# Altium PCB CFD_2Channel.PcbDoc (part 1 of 3)
Units mil, origin at the board's own origin, x right, y up, seen from the top; angles counter-clockwise.
Board outline 5560 x 8750 mil, 4 copper layers (Top Layer, Top Plane, Bottom Plane, Bottom Layer), stack 61.356 mil thick; 216 components, 185 nets, 910 pads, 397 vias.
Unrouted connection lines stored in the file: 1.
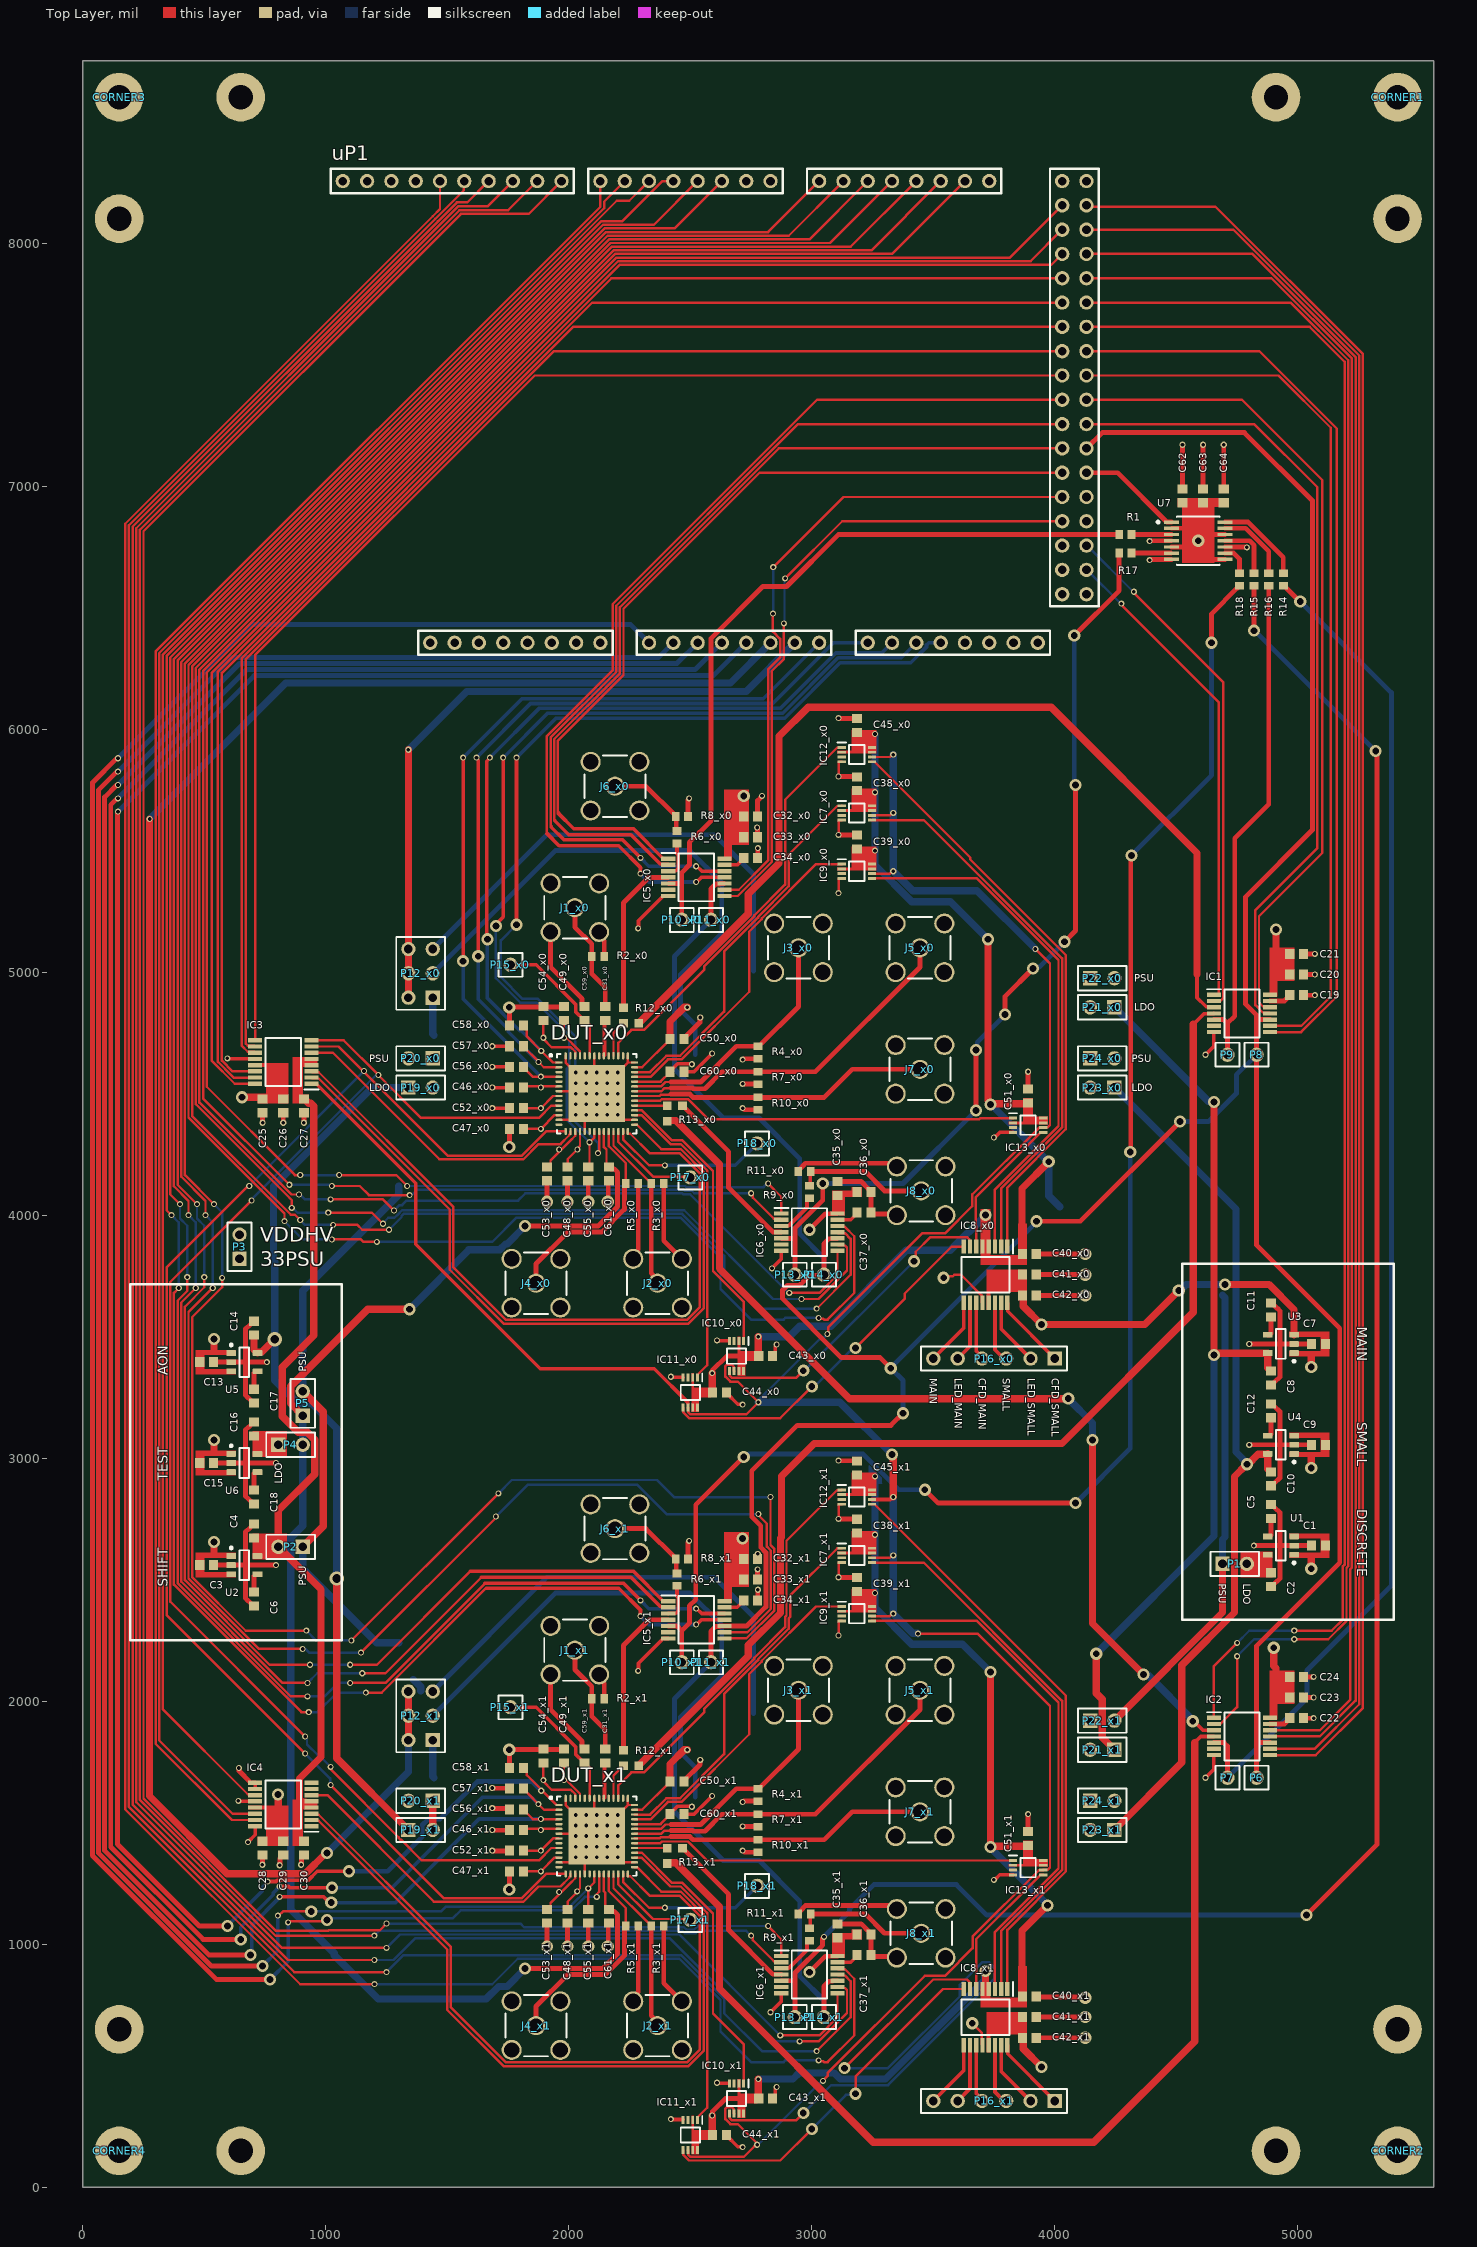
[diagram p0: Top Layer view]
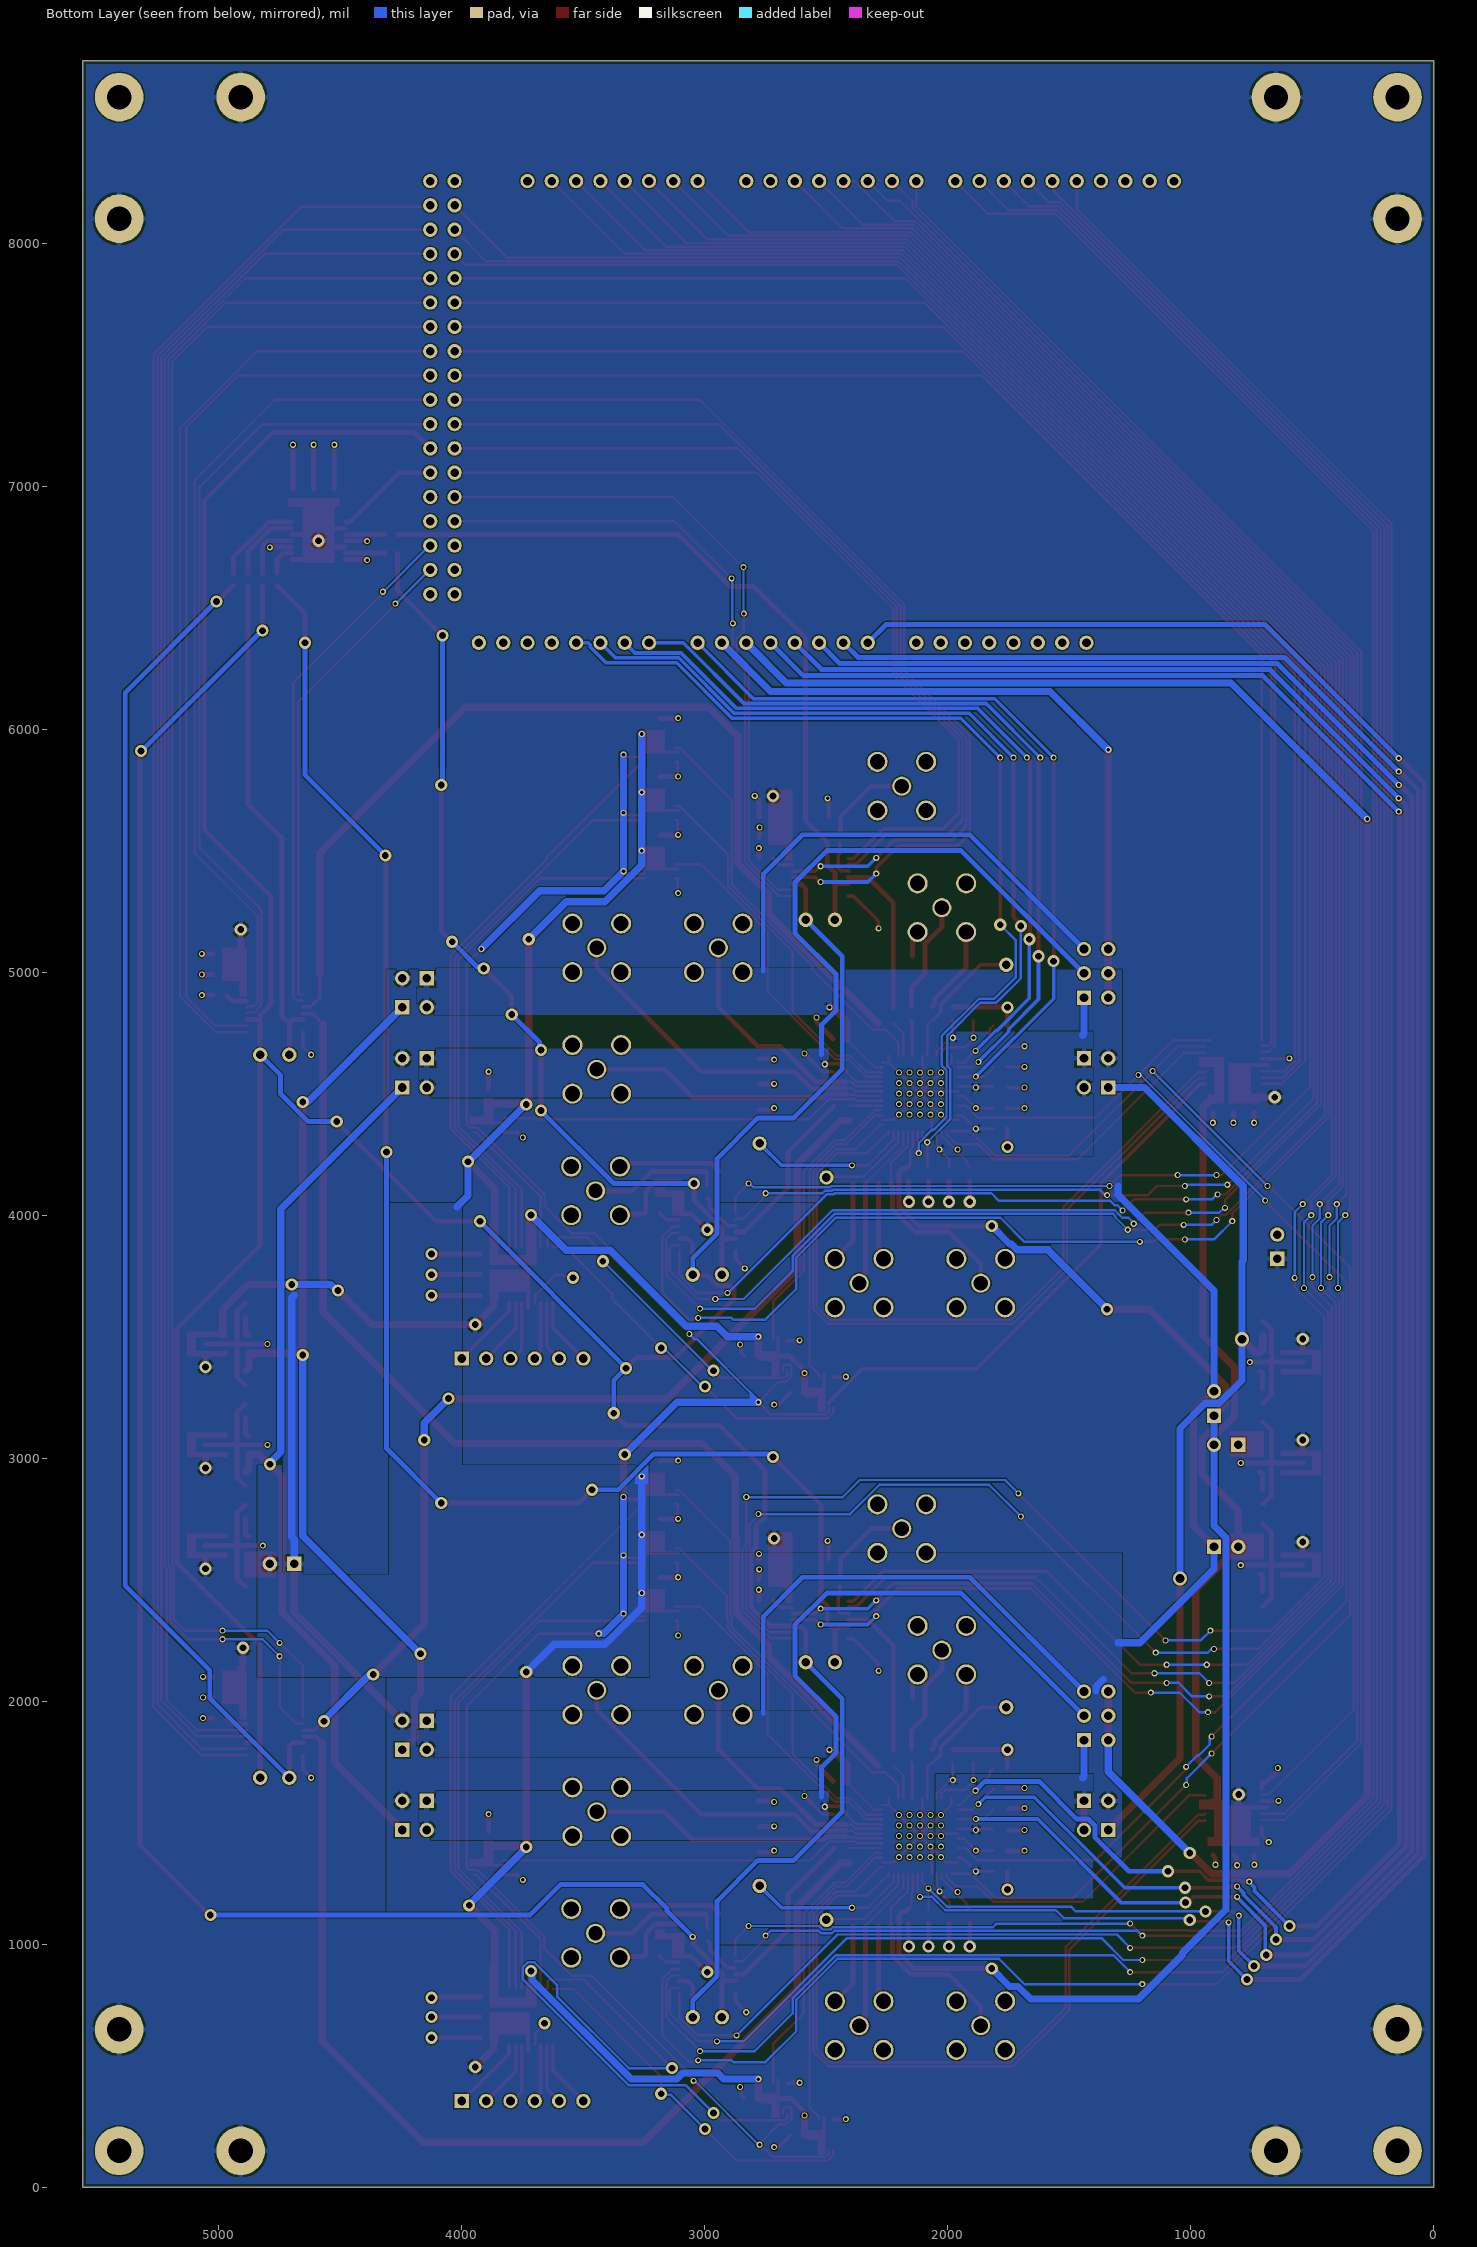
[diagram p1: Bottom Layer view, seen from below]
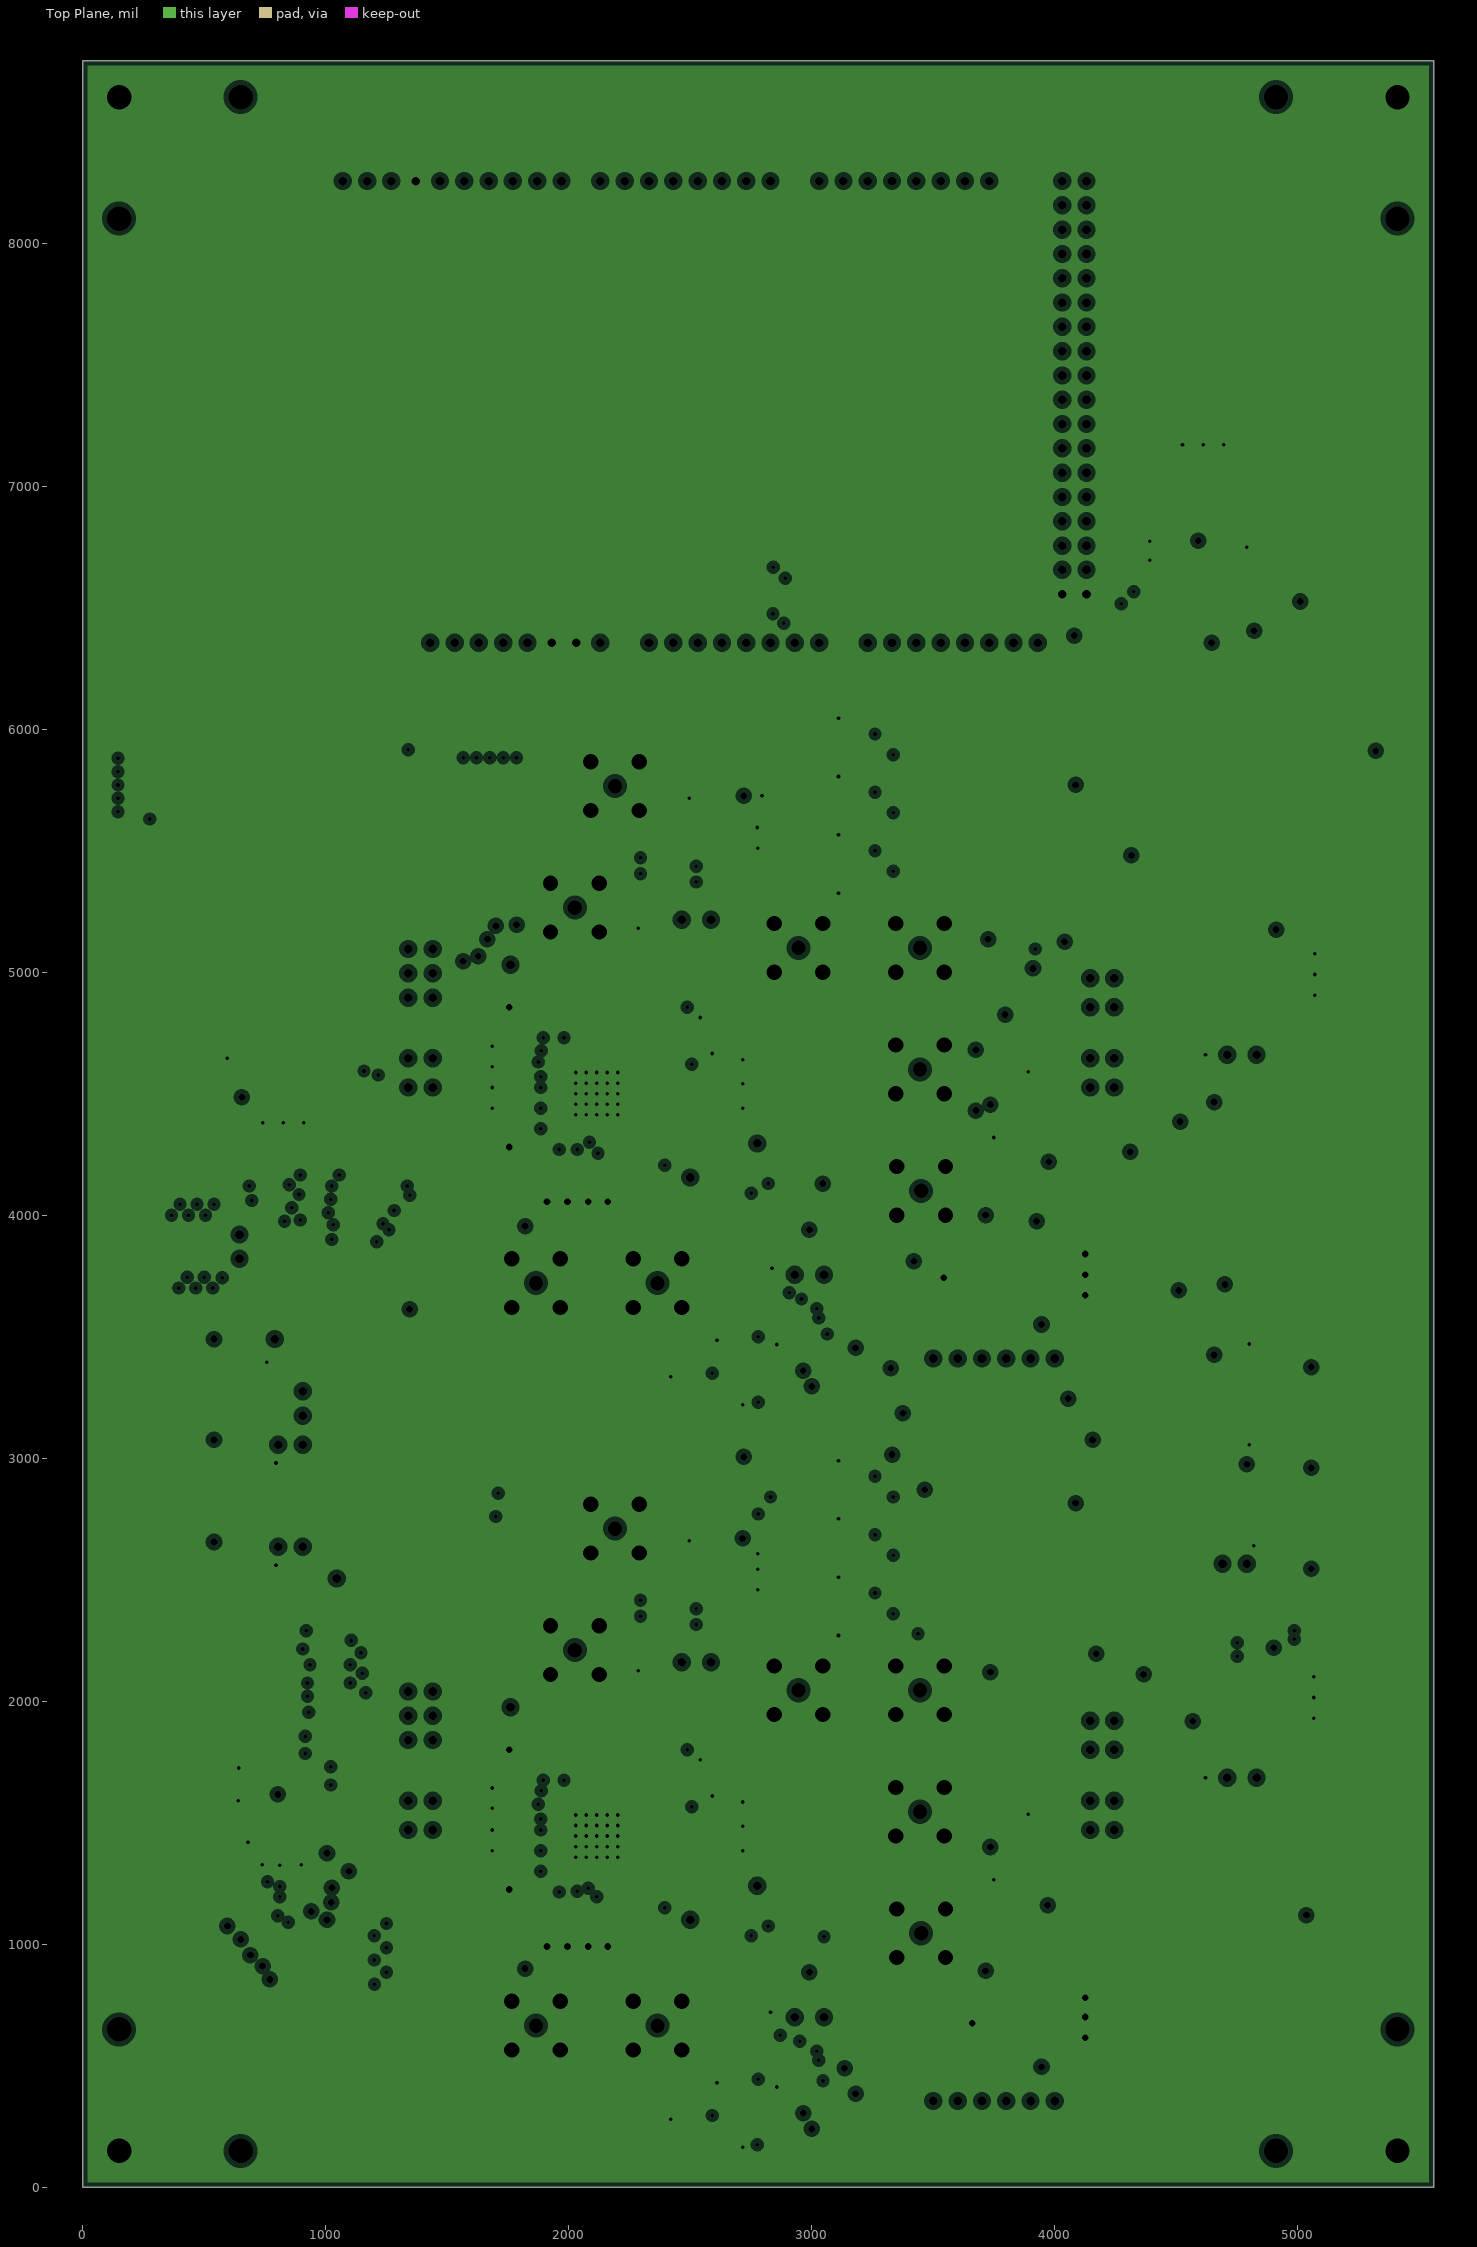
[diagram p2: Top Plane, clearances drawn from the general rule]
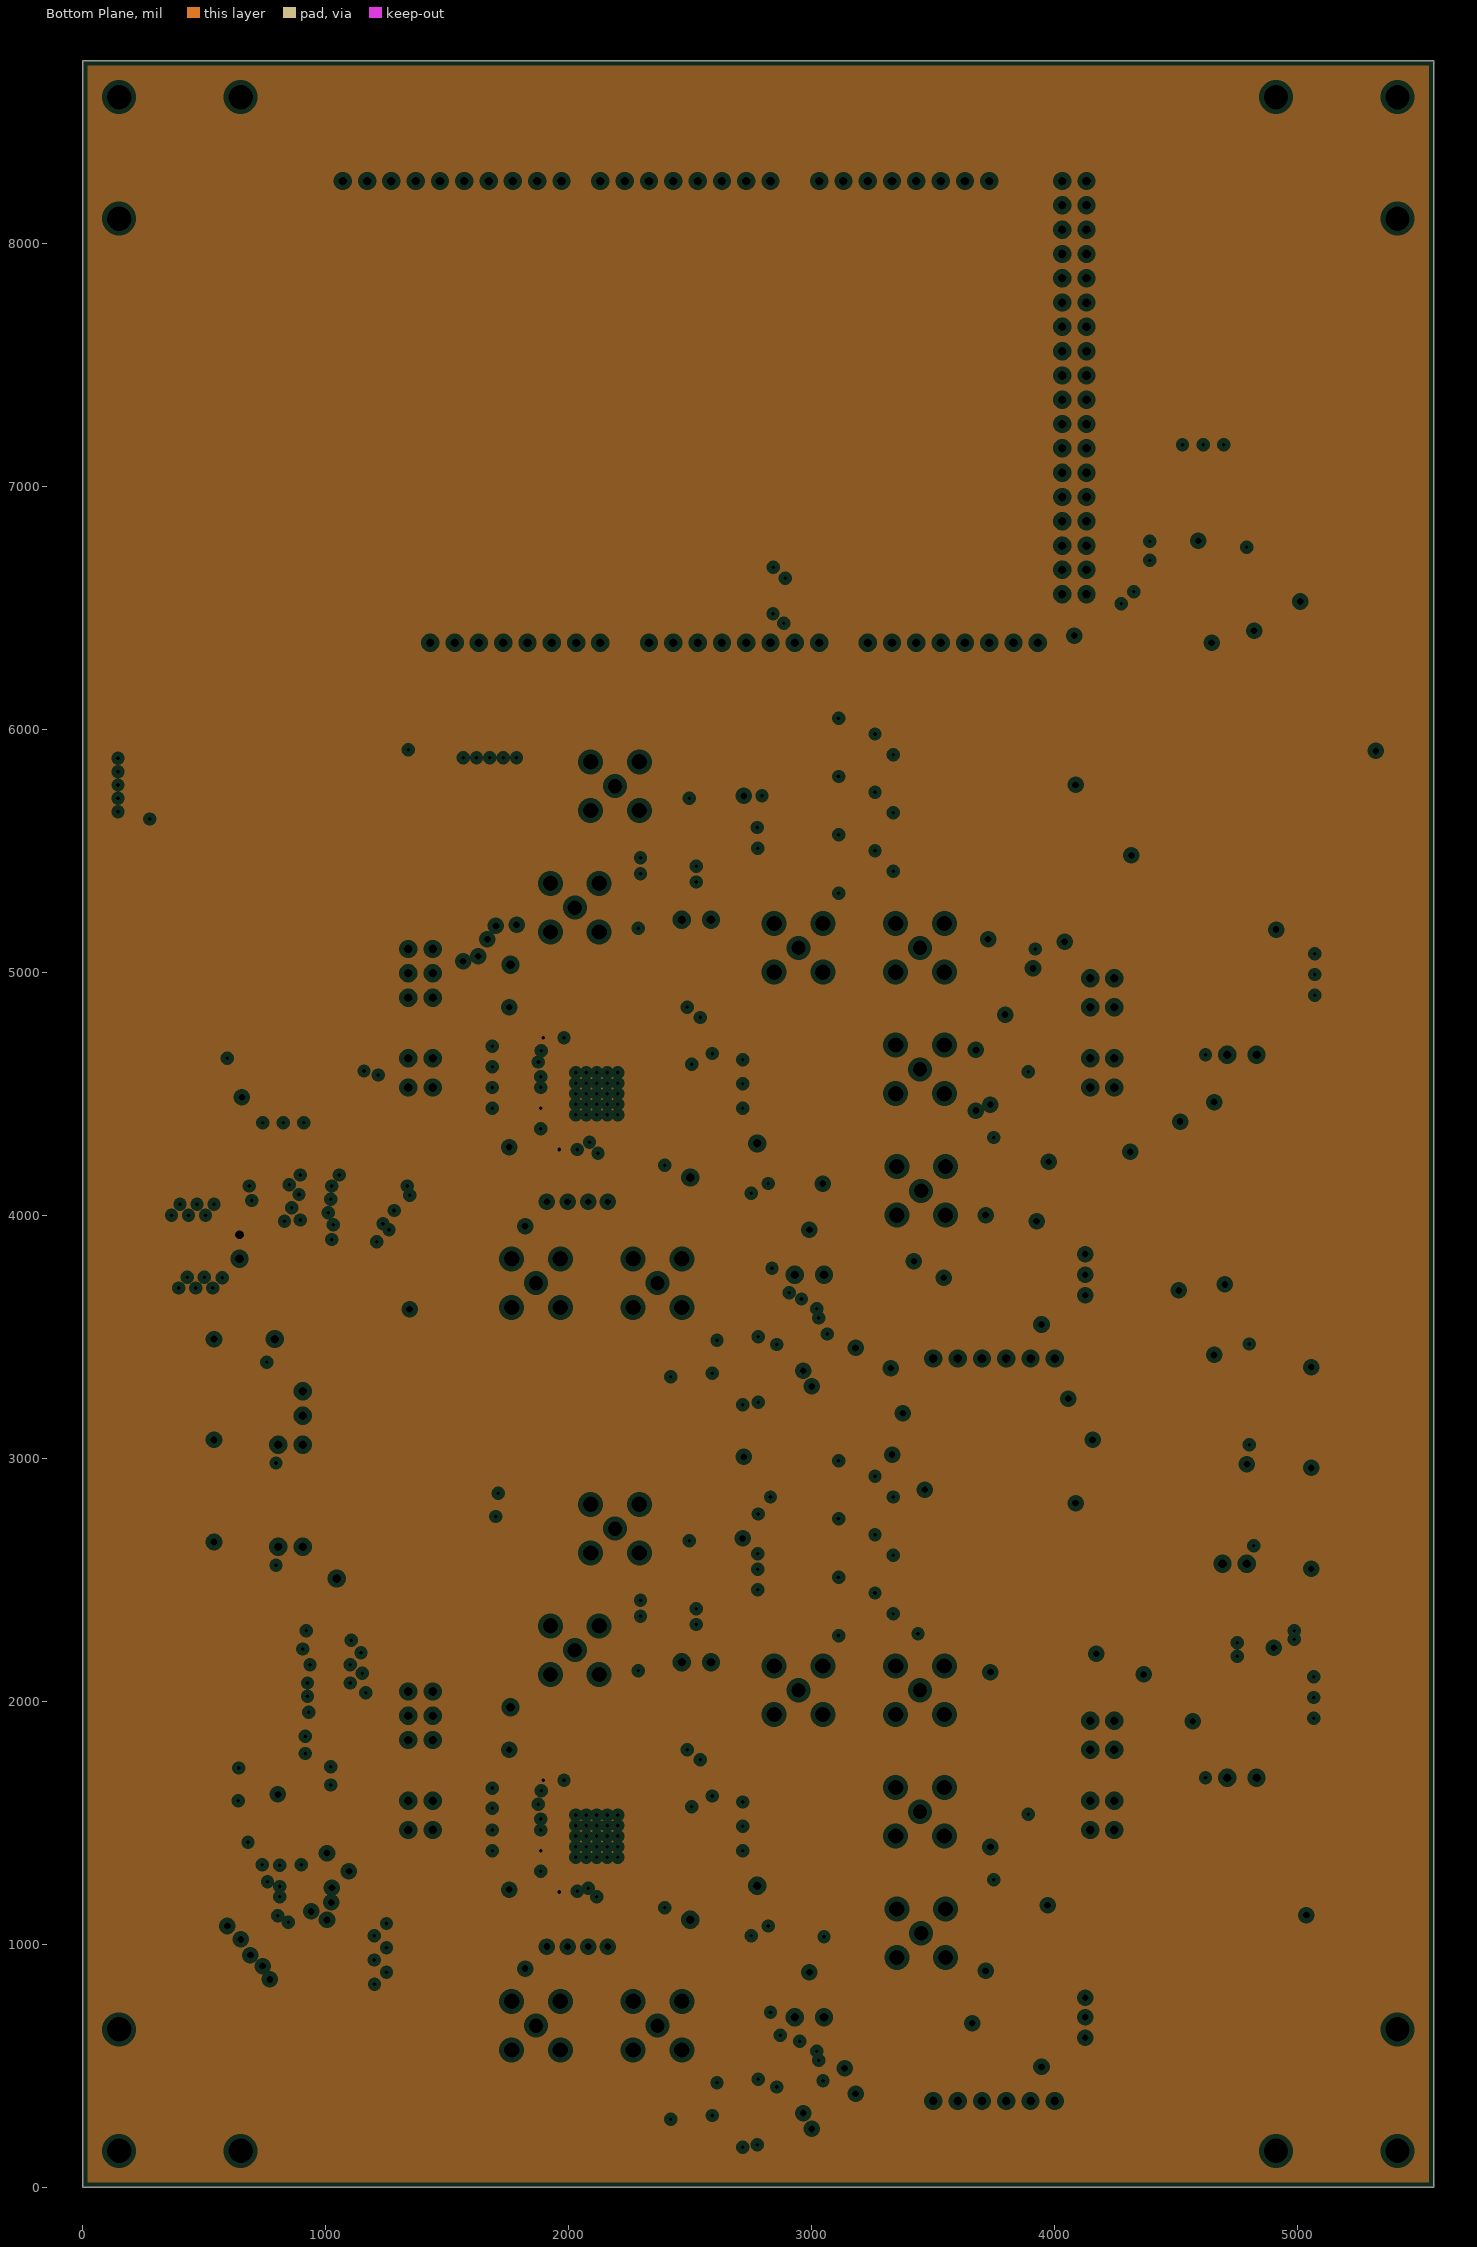
[diagram p3: Bottom Plane, clearances drawn from the general rule]
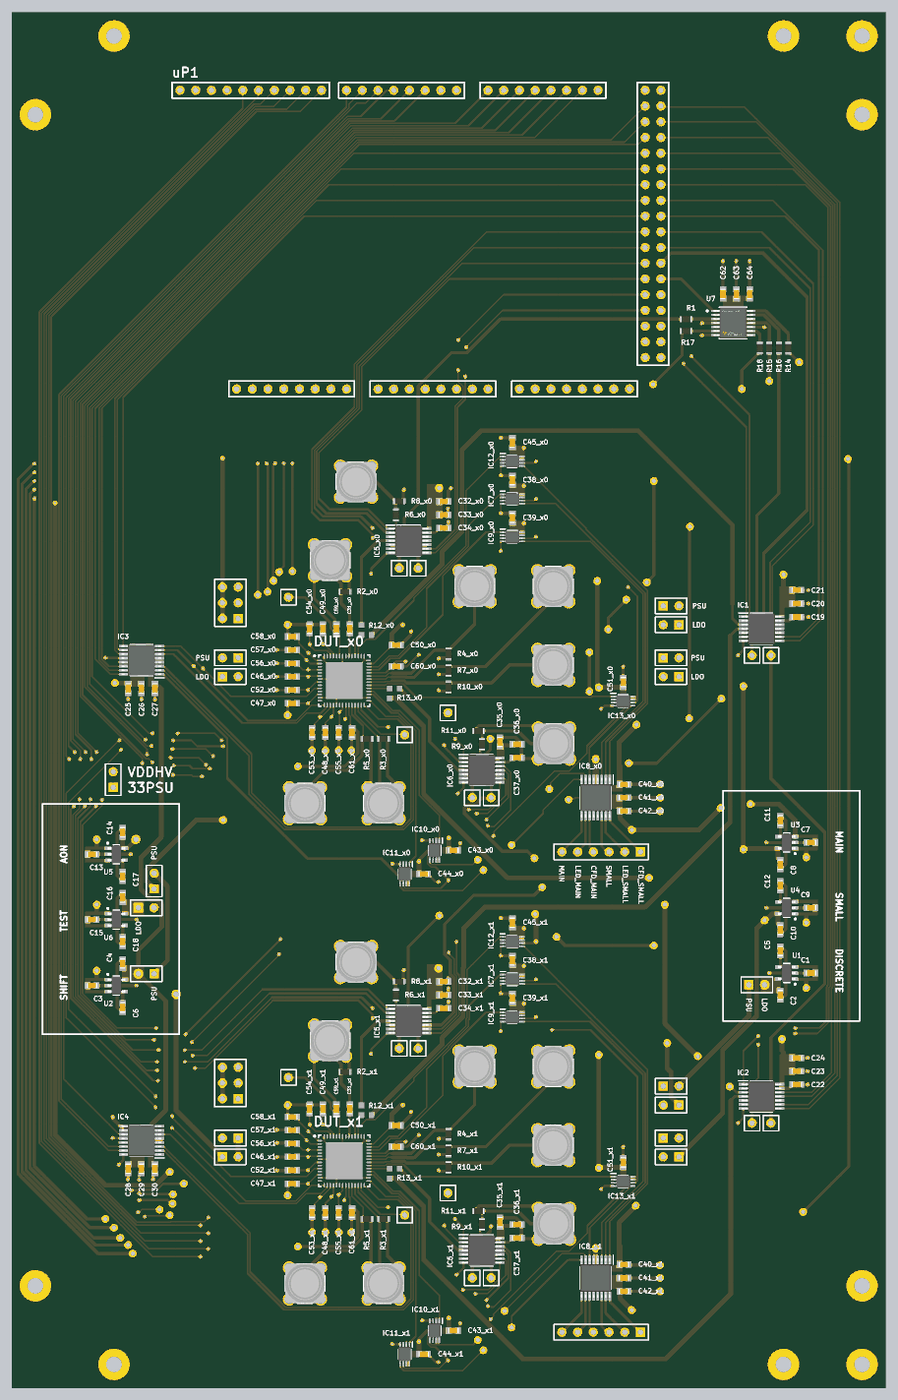
[diagram p6: 3D render of the assembled board from above, using the file's embedded part models]

## Layer stack, top to bottom
Top Solder: solder mask 0.4, Solder Resist, Dk 3.5
Top Layer: signal copper 1.4
Dielectric 2: prepreg 3.8, PP-013, Dk 4.3
Dielectric 4: prepreg 4.6, PP-016, Dk 4.4
Top Plane: plane copper 1.378, net GND
Dielectric 1: core 39, Core-042, Dk 4.6
Bottom Plane: plane copper 1.378, net VDDHV
Dielectric 5: prepreg 4.6, PP-016, Dk 4.4
Dielectric 3: prepreg 3.8, PP-013, Dk 4.3
Bottom Layer: signal copper 1.4
Bottom Solder: solder mask 0.4, Solder Resist, Dk 3.5

## Board outline
0,0 5560,0 5560,8750 0,8750

## Design rules (kind name [scope] priority, off if disabled: settings)
AcuteAngle [All] p1: minimum=6.00000000000000E+0001 checktracksonly=FALSE
BoardOutlineClearance [All] p1: gap=15 ignorepadtopadclearanceinfootprint=FALSE
Clearance Clearance_outa_inner2 [InNamedPolygon('outa_inner2')] p1: gap=40 ignorepadtopadclearanceinfootprint=FALSE except(0: Arc-Hole Track-Hole SMDPad-Hole THPad-Hole Via-Hole Fill-Hole Poly-Hole Region-Hole Text-Hole)
Clearance Clearance_gnd_adc_vbus [InNamedPolygon('gnd_adc') vs InNet('VBUS')] p2: gap=60 ignorepadtopadclearanceinfootprint=FALSE except(0: Arc-Hole Track-Hole SMDPad-Hole THPad-Hole Via-Hole Fill-Hole Poly-Hole Region-Hole Text-Hole)
Clearance Clearance_gnd_adc [InNamedPolygon('gnd_adc')] p3: gap=20 ignorepadtopadclearanceinfootprint=FALSE except(0: Arc-Hole Track-Hole SMDPad-Hole THPad-Hole Via-Hole Fill-Hole Poly-Hole Region-Hole Text-Hole)
Clearance Clearance_dgnd [InNamedPolygon('dgnd')] p4: gap=15 ignorepadtopadclearanceinfootprint=FALSE except(0: Arc-Hole Track-Hole SMDPad-Hole THPad-Hole Via-Hole Fill-Hole Poly-Hole Region-Hole Text-Hole)
Clearance Clearance_vbus_keepout [InPolygon vs OnLayer('Keep-Out Layer')] p5: gap=20 ignorepadtopadclearanceinfootprint=FALSE except(0: Arc-Hole Track-Hole SMDPad-Hole THPad-Hole Via-Hole Fill-Hole Poly-Hole Region-Hole Text-Hole)
Clearance Clearance_vbus [InNamedPolygon('vbus')] p6: gap=60 ignorepadtopadclearanceinfootprint=FALSE except(0: Arc-Hole Track-Hole SMDPad-Hole THPad-Hole Via-Hole Fill-Hole Poly-Hole Region-Hole Text-Hole)
Clearance Clearance_gnd [InNamedPolygon('gnd')] p7: gap=10 ignorepadtopadclearanceinfootprint=FALSE except(0: Arc-Hole Track-Hole SMDPad-Hole THPad-Hole Via-Hole Fill-Hole Poly-Hole Region-Hole Text-Hole)
Clearance [All] p8: gap=5 ignorepadtopadclearanceinfootprint=FALSE except(0: Arc-Hole Track-Hole SMDPad-Hole THPad-Hole Via-Hole Fill-Hole Poly-Hole Region-Hole Text-Hole)
DiffPairsRouting [All] p1: maxlimit=25 minlimit=5 mostfreqgap=6 toplayer_minwidth=10 toplayer_maxwidth=15 toplayer_prefwidth=15 bottomlayer_minwidth=10 bottomlayer_maxwidth=15 bottomlayer_prefwidth=15 maxuncoupledlength=500
HoleSize [All] p1: absolutevalues=TRUE maxlimit=300 minlimit=10 maxpercent=80.000 minpercent=20.000
MinimumAnnularRing [All] p1: minimumring=5
MinimumSolderMaskSliver [All] p1: minsoldermaskwidth=2
PlaneClearance [All] p1: clearance=20
PlaneConnect [All] p1: planeconnectstyle=Relief reliefexpansion=5 reliefentries=4 reliefconductorwidth=10 reliefairgap=10
PolygonConnect PolygonConnect_4 [All vs IsNamedPolygon('33PSU_x0')] p1: thpad.connectstyle=Relief thpad.reliefconductorwidth=20 thpad.reliefentries=4 thpad.polygonreliefangle="90 Angle" thpad.airgapwidth=10 smdpad.connectstyle=Direct smdpad.reliefconductorwidth=10 smdpad.reliefentries=4 smdpad.polygonreliefangle="90 Angle" smdpad.airgapwidth=10 via.connectstyle=Relief via.reliefconductorwidth=20 via.reliefentries=4 via.polygonreliefangle="90 Angle" via.airgapwidth=10
PolygonConnect PolygonConnect_3 [All] p2: thpad.connectstyle=Relief thpad.reliefconductorwidth=20 thpad.reliefentries=4 thpad.polygonreliefangle="90 Angle" thpad.airgapwidth=10 smdpad.connectstyle=Direct smdpad.reliefconductorwidth=10 smdpad.reliefentries=4 smdpad.polygonreliefangle="90 Angle" smdpad.airgapwidth=10 via.connectstyle=Relief via.reliefconductorwidth=20 via.reliefentries=4 via.polygonreliefangle="90 Angle" via.airgapwidth=10
PolygonConnect PolygonConnect_2 [All vs IsNamedPolygon('33PSU_x0')] p3: thpad.connectstyle=Relief thpad.reliefconductorwidth=10 thpad.reliefentries=4 thpad.polygonreliefangle="90 Angle" thpad.airgapwidth=10 smdpad.connectstyle=Direct smdpad.reliefconductorwidth=10 smdpad.reliefentries=4 smdpad.polygonreliefangle="90 Angle" smdpad.airgapwidth=10 via.connectstyle=Relief via.reliefconductorwidth=20 via.reliefentries=4 via.polygonreliefangle="90 Angle" via.airgapwidth=10
PolygonConnect PolygonConnect_1 [All vs IsNamedPolygon('33PSU_x0')] p4: thpad.connectstyle=Relief thpad.reliefconductorwidth=10 thpad.reliefentries=4 thpad.polygonreliefangle="90 Angle" thpad.airgapwidth=10 smdpad.connectstyle=Direct smdpad.reliefconductorwidth=10 smdpad.reliefentries=4 smdpad.polygonreliefangle="90 Angle" smdpad.airgapwidth=10 via.connectstyle=Relief via.reliefconductorwidth=20 via.reliefentries=4 via.polygonreliefangle="90 Angle" via.airgapwidth=10
PolygonConnect [All] p5: connectstyle=Relief reliefconductorwidth=6 reliefentries=4 polygonreliefangle="90 Angle" airgapwidth=6
RoomDefinition x1 [InComponentClass('x1')] p1: confinementstyle=ConfineIn formatcopy=TRUE lockcomponents=FALSE outline 1075,0 4510,0 4510,3055 1075,3055
RoomDefinition x0 [InComponentClass('x0')] p2: confinementstyle=ConfineIn formatcopy=TRUE lockcomponents=FALSE outline 1075,3055 4510,3055 4510,6110 1075,6110
RoutingVias [All] p1: holewidth=12 width=24 viastyle="Through Hole" minholewidth=10 minwidth=22 maxholewidth=200 maxwidth=200
SilkToSilkClearance [All] p1: silktosilkclearance=5
SilkToSolderMaskClearance [IsPad] p1: minsilkscreentomaskgap=3 clearancetoexposedcopper=FALSE
SolderMaskExpansion [All] p1: expansion=2.2 istentingtop=FALSE
Width [All] p1: maxlimit=1000 minlimit=5 preferedwidth=10 minimp=50.000000 maximp=50.000000 favimp=50.000000
23 further rules are at their usual default settings.

## Classes and differential pairs
net class TDC_CLK_SMALL_SINGLE[0..1]: TDC_CLK_SMALL_SINGLE0 TDC_CLK_SMALL_SINGLE1
net class TDC_CLK_MAIN_SINGLE[0..1]: TDC_CLK_MAIN_SINGLE0 TDC_CLK_MAIN_SINGLE1
net class VDDMEAS[0..1]: VDDMEAS0 VDDMEAS1
net class VDDSMALL[0..1]: VDDSMALL0 VDDSMALL1
net class VDDMAIN[0..1]: VDDMAIN0 VDDMAIN1
net class VDDAON[0..1]: VDDAON0 VDDAON1
channel class Channel: x0 x1
net class VRST_PK_TEST[0..1]: VRST_PK_TEST0 VRST_PK_TEST1
net class VREF_PREAMP[0..1]: VREF_PREAMP0 VREF_PREAMP1
net class VREF_ATTEN_MAIN[0..1]: VREF_ATTEN_MAIN0 VREF_ATTEN_MAIN1
net class VOUT_PK_TEST[0..1]: VOUT_PK_TEST0 VOUT_PK_TEST1
net class VDAC_SMALL[0..1]: VDAC_SMALL0 VDAC_SMALL1
net class VDAC_MAIN[0..1]: VDAC_MAIN0 VDAC_MAIN1
net class VBG_TEST[0..1]: VBG_TEST0 VBG_TEST1
net class TDC_TRIGG_SMALL_SINGLE_33[0..1]: TDC_TRIGG_SMALL_SINGLE_330 TDC_TRIGG_SMALL_SINGLE_331
net class TDC_TRIGG_MAIN_SINGLE_33[0..1]: TDC_TRIGG_MAIN_SINGLE_330 TDC_TRIGG_MAIN_SINGLE_331
net class TDC_INTRb_SMALL_SINGLE_33[0..1]: TDC_INTRb_SMALL_SINGLE_330 TDC_INTRb_SMALL_SINGLE_331
net class TDC_INTRb_MAIN_SINGLE_33[0..1]: TDC_INTRb_MAIN_SINGLE_330 TDC_INTRb_MAIN_SINGLE_331
net class TDC_EN_SMALL_SINGLE_33[0..1]: TDC_EN_SMALL_SINGLE_330 TDC_EN_SMALL_SINGLE_331
net class TDC_EN_MAIN_SINGLE_33[0..1]: TDC_EN_MAIN_SINGLE_330 TDC_EN_MAIN_SINGLE_331
net class SPI_DOUT_SMALL_SINGLE_33[0..1]: SPI_DOUT_SMALL_SINGLE_330 SPI_DOUT_SMALL_SINGLE_331
net class SPI_DOUT_MAIN_SINGLE_33[0..1]: SPI_DOUT_MAIN_SINGLE_330 SPI_DOUT_MAIN_SINGLE_331
net class SPI_CSb_SMALL_SINGLE_33[0..1]: SPI_CSb_SMALL_SINGLE_330 SPI_CSb_SMALL_SINGLE_331
net class SPI_CSb_MAIN_SINGLE_33[0..1]: SPI_CSb_MAIN_SINGLE_330 SPI_CSb_MAIN_SINGLE_331
net class SPI_CLK_SMALL_SINGLE_33[0..1]: SPI_CLK_SMALL_SINGLE_330 SPI_CLK_SMALL_SINGLE_331
net class SPI_CLK_MAIN_SINGLE_33[0..1]: SPI_CLK_MAIN_SINGLE_330 SPI_CLK_MAIN_SINGLE_331
net class SCAN_OUTb_18[0..1]: SCAN_OUTb_180 SCAN_OUTb_181
net class SCAN_LOADb_18[0..1]: SCAN_LOADb_180 SCAN_LOADb_181
net class SCAN_CLK_18[0..1]: SCAN_CLK_180 SCAN_CLK_181
net class OUT_SMALL_HV_DUAL[0..1]: OUT_SMALL_HV_DUAL0 OUT_SMALL_HV_DUAL1
net class OUT_MAIN_HV_DUAL[0..1]: OUT_MAIN_HV_DUAL0 OUT_MAIN_HV_DUAL1
component class x1: C31_x1 C32_x1 C33_x1 C34_x1 C35_x1 C36_x1 C37_x1 C38_x1 C39_x1 C40_x1 C41_x1 C42_x1 C43_x1 C44_x1 C45_x1 C46_x1 C47_x1 C48_x1 C49_x1 C50_x1 C51_x1 C52_x1 C53_x1 C54_x1 C55_x1 C56_x1 C57_x1 C58_x1 C59_x1 C60_x1 C61_x1 DUT_x1 IC5_x1 IC6_x1 IC7_x1 IC8_x1 IC9_x1 IC10_x1 IC11_x1 IC12_x1 IC13_x1 J1_x1 J2_x1 J3_x1 J4_x1 J5_x1 J6_x1 J7_x1 J8_x1 P10_x1 P11_x1 P12_x1 P13_x1 P14_x1 P15_x1 P16_x1 P17_x1 P18_x1 P19_x1 P20_x1 P21_x1 P22_x1 P23_x1 P24_x1 R2_x1 R3_x1 R4_x1 R5_x1 R6_x1 R7_x1 R8_x1 R9_x1 R10_x1 R11_x1 R12_x1 R13_x1
component class x0: C31_x0 C32_x0 C33_x0 C34_x0 C35_x0 C36_x0 C37_x0 C38_x0 C39_x0 C40_x0 C41_x0 C42_x0 C43_x0 C44_x0 C45_x0 C46_x0 C47_x0 C48_x0 C49_x0 C50_x0 C51_x0 C52_x0 C53_x0 C54_x0 C55_x0 C56_x0 C57_x0 C58_x0 C59_x0 C60_x0 C61_x0 DUT_x0 IC5_x0 IC6_x0 IC7_x0 IC8_x0 IC9_x0 IC10_x0 IC11_x0 IC12_x0 IC13_x0 J1_x0 J2_x0 J3_x0 J4_x0 J5_x0 J6_x0 J7_x0 J8_x0 P10_x0 P11_x0 P12_x0 P13_x0 P14_x0 P15_x0 P16_x0 P17_x0 P18_x0 P19_x0 P20_x0 P21_x0 P22_x0 P23_x0 P24_x0 R2_x0 R3_x0 R4_x0 R5_x0 R6_x0 R7_x0 R8_x0 R9_x0 R10_x0 R11_x0 R12_x0 R13_x0
component class Shared: C1 C2 C3 C4 C5 C6 C7 C8 C9 C10 C11 C12 C13 C14 C15 C16 C17 C18 C19 C20 C21 C22 C23 C24 C25 C26 C27 C28 C29 C30 C62 C63 C64 CORNER1 CORNER2 CORNER3 CORNER4 IC1 IC2 IC3 IC4 P1 P2 P3 P4 P5 P6 P7 P8 P9 R1 R14 R15 R16 R17 R18 U1 U2 U3 U4 U5 U6 U7 uP1

## Components (designator, comment, footprint, x,y, rotation, side; value= is the part's Value field where it differs from the comment)
C1 "10nF" CAPC1608X90X35ML10T15 5085,2640 r180 top
C2 "10nF" CAPC1608X90X35ML10T15 4890,2500 r270 top
C3 "10nF" CAPC1608X90X35ML10T15 510,2560 r0 top
C4 "10nF" CAPC1608X90X35ML10T15 705,2700 r90 top
C5 "10nF" CAPC1608X90X35ML10T15 4890,2780 r90 top
C6 "10nF" CAPC1608X90X35ML10T15 705,2420 r270 top
C7 "10nF" CAPC1608X90X35ML10T15 5085,3470 r180 top
C8 "10nF" CAPC1608X90X35ML10T15 4890,3330 r270 top
C9 "10nF" CAPC1608X90X35ML10T15 5085,3055 r180 top
C10 "10nF" CAPC1608X90X35ML10T15 4890,2915 r270 top
C11 "10nF" CAPC1608X90X35ML10T15 4890,3610 r90 top
C12 "10nF" CAPC1608X90X35ML10T15 4890,3195 r90 top
C13 "10nF" CAPC1608X90X35ML10T15 510,3395 r0 top
C14 "10nF" CAPC1608X90X35ML10T15 705,3535 r90 top
C15 "10nF" CAPC1608X90X35ML10T15 510,2980 r0 top
C16 "10nF" CAPC1608X90X35ML10T15 705,3120 r90 top
C17 "10nF" CAPC1608X90X35ML10T15 705,3255 r270 top
C18 "10nF" CAPC1608X90X35ML10T15 705,2840 r270 top
C19 "1uF" CAPC1608X90X35ML10T15 4995,4905 r0 top
C20 "100nF" CAPC1608X90X35ML10T15 4995,4990 r0 top
C21 "1uF" CAPC1608X90X35ML10T15 4995,5075 r0 top
C22 "1uF" CAPC1608X90X35ML10T15 4995,1930 r0 top
C23 "100nF" CAPC1608X90X35ML10T15 4995,2015 r0 top
C24 "1uF" CAPC1608X90X35ML10T15 4995,2100 r0 top
C25 "1uF" CAPC1608X90X35ML10T15 740,4450 r90 top
C26 "100nF" CAPC1608X90X35ML10T15 825,4450 r90 top
C27 "100nF" CAPC1608X90X35ML10T15 910,4450 r270 top
C28 "1uF" CAPC1608X90X35ML10T15 740,1395 r90 top
C29 "100nF" CAPC1608X90X35ML10T15 825,1395 r90 top
C30 "100nF" CAPC1608X90X35ML10T15 910,1395 r270 top
C31_x0 "2-3pF" CAPC1608X90X35ML10T15 2150,4830 r270 top (schematic designator C31)
C31_x1 "2-3pF" CAPC1608X90X35ML10T15 2150,1775 r270 top (schematic designator C31)
C32_x0 "100nF" CAPC1608X90X35ML10T15 2748.54,5640 r0 top (schematic designator C32)
C32_x1 "100nF" CAPC1608X90X35ML10T15 2748.54,2585 r0 top (schematic designator C32)
C33_x0 "1uF" CAPC1608X90X35ML10T15 2748.54,5555 r0 top (schematic designator C33)
C33_x1 "1uF" CAPC1608X90X35ML10T15 2748.54,2500 r0 top (schematic designator C33)
C34_x0 "1uF" CAPC1608X90X35ML10T15 2748.54,5470 r0 top (schematic designator C34)
C34_x1 "1uF" CAPC1608X90X35ML10T15 2748.54,2415 r0 top (schematic designator C34)
C35_x0 "100nF" CAPC1608X90X35ML10T15 3105,4110 r90 top (schematic designator C35)
C35_x1 "100nF" CAPC1608X90X35ML10T15 3105,1055 r90 top (schematic designator C35)
C36_x0 "1uF" CAPC1608X90X35ML10T15 3215,4095 r0 top (schematic designator C36)
C36_x1 "1uF" CAPC1608X90X35ML10T15 3215,1040 r0 top (schematic designator C36)
C37_x0 "1uF" CAPC1608X90X35ML10T15 3215,4010 r0 top (schematic designator C37)
C37_x1 "1uF" CAPC1608X90X35ML10T15 3215,955 r0 top (schematic designator C37)
C38_x0 "10nF" CAPC1608X90X35ML10T15 3185,5775 r270 top (schematic designator C38)
C38_x1 "10nF" CAPC1608X90X35ML10T15 3185,2720 r270 top (schematic designator C38)
C39_x0 "10nF" CAPC1608X90X35ML10T15 3185,5535 r270 top (schematic designator C39)
C39_x1 "10nF" CAPC1608X90X35ML10T15 3185,2480 r270 top (schematic designator C39)
C40_x0 "100nF" CAPC1608X90X35ML10T15 3895,3840 r180 top (schematic designator C40)
C40_x1 "100nF" CAPC1608X90X35ML10T15 3895,785 r180 top (schematic designator C40)
C41_x0 "100nF" CAPC1608X90X35ML10T15 3895,3755 r180 top (schematic designator C41)
C41_x1 "100nF" CAPC1608X90X35ML10T15 3895,700 r180 top (schematic designator C41)
C42_x0 "10nF" CAPC1608X90X35ML10T15 3895,3670 r180 top (schematic designator C42)
C42_x1 "10nF" CAPC1608X90X35ML10T15 3895,615 r180 top (schematic designator C42)
C43_x0 "10nF" CAPC1608X90X35ML10T15 2810,3420 r180 top (schematic designator C43)
C43_x1 "10nF" CAPC1608X90X35ML10T15 2810,365 r180 top (schematic designator C43)
C44_x0 "10nF" CAPC1608X90X35ML10T15 2620,3270 r180 top (schematic designator C44)
C44_x1 "10nF" CAPC1608X90X35ML10T15 2620,215 r180 top (schematic designator C44)
C45_x0 "10nF" CAPC1608X90X35ML10T15 3185,6015 r270 top (schematic designator C45)
C45_x1 "10nF" CAPC1608X90X35ML10T15 3185,2960 r270 top (schematic designator C45)
C46_x0 "10nF" CAPC1608X90X35ML10T15 1785,4525 r0 top (schematic designator C46)
C46_x1 "10nF" CAPC1608X90X35ML10T15 1785,1470 r0 top (schematic designator C46)
C47_x0 "10nF" CAPC1608X90X35ML10T15 1785,4355 r0 top (schematic designator C47)
C47_x1 "10nF" CAPC1608X90X35ML10T15 1785,1300 r0 top (schematic designator C47)
C48_x0 "10nF" CAPC1608X90X35ML10T15 1995,4170 r90 top (schematic designator C48)
C48_x1 "10nF" CAPC1608X90X35ML10T15 1995,1115 r90 top (schematic designator C48)
C49_x0 "10nF" CAPC1608X90X35ML10T15 1980,4830 r270 top (schematic designator C49)
C49_x1 "10nF" CAPC1608X90X35ML10T15 1980,1775 r270 top (schematic designator C49)
C50_x0 "10nF" CAPC1608X90X35ML10T15 2445,4725 r180 top (schematic designator C50)
C50_x1 "10nF" CAPC1608X90X35ML10T15 2445,1670 r180 top (schematic designator C50)
C51_x0 "10nF" CAPC1608X90X35ML10T15 3890,4490 r270 top (schematic designator C51)
C51_x1 "10nF" CAPC1608X90X35ML10T15 3890,1435 r270 top (schematic designator C51)
C52_x0 "10nF" CAPC1608X90X35ML10T15 1785,4440 r0 top (schematic designator C52)
C52_x1 "10nF" CAPC1608X90X35ML10T15 1785,1385 r0 top (schematic designator C52)
C53_x0 "10nF" CAPC1608X90X35ML10T15 1910,4170 r90 top (schematic designator C53)
C53_x1 "10nF" CAPC1608X90X35ML10T15 1910,1115 r90 top (schematic designator C53)
C54_x0 "10nF" CAPC1608X90X35ML10T15 1895,4830 r270 top (schematic designator C54)
C54_x1 "10nF" CAPC1608X90X35ML10T15 1895,1775 r270 top (schematic designator C54)
C55_x0 "10nF" CAPC1608X90X35ML10T15 2080,4170 r90 top (schematic designator C55)
C55_x1 "10nF" CAPC1608X90X35ML10T15 2080,1115 r90 top (schematic designator C55)
C56_x0 "10nF" CAPC1608X90X35ML10T15 1785,4610 r0 top (schematic designator C56)
C56_x1 "10nF" CAPC1608X90X35ML10T15 1785,1555 r0 top (schematic designator C56)
C57_x0 "10nF" CAPC1608X90X35ML10T15 1785,4695 r0 top (schematic designator C57)
C57_x1 "10nF" CAPC1608X90X35ML10T15 1785,1640 r0 top (schematic designator C57)
C58_x0 "10nF" CAPC1608X90X35ML10T15 1785,4780 r0 top (schematic designator C58)
C58_x1 "10nF" CAPC1608X90X35ML10T15 1785,1725 r0 top (schematic designator C58)
C59_x0 "10nF" CAPC1608X90X35ML10T15 2065,4830 r270 top (schematic designator C59)
C59_x1 "10nF" CAPC1608X90X35ML10T15 2065,1775 r270 top (schematic designator C59)
C60_x0 "10nF" CAPC1608X90X35ML10T15 2445,4590 r180 top (schematic designator C60)
C60_x1 "10nF" CAPC1608X90X35ML10T15 2445,1535 r180 top (schematic designator C60)
C61_x0 "10nF" CAPC1608X90X35ML10T15 2165,4170 r90 top (schematic designator C61)
C61_x1 "10nF" CAPC1608X90X35ML10T15 2165,1115 r90 top (schematic designator C61)
C62 "100nF" CAPC1608X90X35ML10T15 4525,6960 r90 top
C63 "1uF" CAPC1608X90X35ML10T15 4610,6960 r90 top
C64 "10uF" CAPC1608X90X35ML10T15 4695,6960 r90 top
CORNER1 "Corner Mount" CornerMount#1 5410,8600 r90 top
CORNER2 "Corner Mount" CornerMount#1 5410,150 r90 top
CORNER3 "Corner Mount" CornerMount#2 -1990,7000 r90 top
CORNER4 "Corner Mount" CornerMount#3 -1990,150 r90 top
DUT_x0 "CFD_Respin_Correct" QFN50P800X800X80_HS-57N_WIDEVIAS 2115,4500 r0 top (schematic designator DUT)
DUT_x1 "CFD_Respin_Correct" QFN50P800X800X80_HS-57N_WIDEVIAS 2115,1445 r0 top (schematic designator DUT)
IC1 "TDC7200PWR" SOP65P640X120-14N 4770,4830 r0 top
IC2 "TDC7200PWR" SOP65P640X120-14N 4770,1855 r0 top
IC3 "MAX13003EEUE+" SOP65P640X110-16N 825,4630 r180 top
IC4 "MAX13003EEUE+" SOP65P640X110-16N 825,1575 r180 top
IC5_x0 "TDC7200PWR" SOP65P640X120-14N 2525,5390 r0 top (schematic designator IC5)
IC5_x1 "TDC7200PWR" SOP65P640X120-14N 2525,2335 r0 top (schematic designator IC5)
IC6_x0 "TDC7200PWR" SOP65P640X120-14N 2990,3930 r0 top (schematic designator IC6)
IC6_x1 "TDC7200PWR" SOP65P640X120-14N 2990,875 r0 top (schematic designator IC6)
IC7_x0 "NL17SZ74USG" SOP50P310X90-8N 3185,5655 r0 top (schematic designator IC7)
IC7_x1 "NL17SZ74USG" SOP50P310X90-8N 3185,2600 r0 top (schematic designator IC7)
IC8_x0 "MAX13003EEUE+" SOP65P640X110-16N 3715,3755 r270 top (schematic designator IC8)
IC8_x1 "MAX13003EEUE+" SOP65P640X110-16N 3715,700 r270 top (schematic designator IC8)
IC9_x0 "NL17SZ74USG" SOP50P310X90-8N 3185,5415 r0 top (schematic designator IC9)
IC9_x1 "NL17SZ74USG" SOP50P310X90-8N 3185,2360 r0 top (schematic designator IC9)
IC10_x0 "NL17SZ74USG" SOP50P310X90-8N 2690,3420 r270 top (schematic designator IC10)
IC10_x1 "NL17SZ74USG" SOP50P310X90-8N 2690,365 r270 top (schematic designator IC10)
IC11_x0 "NL17SZ74USG" SOP50P310X90-8N 2500,3270 r270 top (schematic designator IC11)
IC11_x1 "NL17SZ74USG" SOP50P310X90-8N 2500,215 r270 top (schematic designator IC11)
IC12_x0 "NL17SZ74USG" SOP50P310X90-8N 3185,5895 r0 top (schematic designator IC12)
IC12_x1 "NL17SZ74USG" SOP50P310X90-8N 3185,2840 r0 top (schematic designator IC12)
IC13_x0 "NL17SZ74USG" SOP50P310X90-8N 3890,4370 r0 top (schematic designator IC13)
IC13_x1 "NL17SZ74USG" SOP50P310X90-8N 3890,1315 r0 top (schematic designator IC13)
J1_x0 "5-1814832-1" TECO-5-1814832-1_V 2025,5265 r0 top (schematic designator J1)
J1_x1 "5-1814832-1" TECO-5-1814832-1_V 2025,2210 r0 top (schematic designator J1)
J2_x0 "5-1814832-1" TECO-5-1814832-1_V 2365,3720 r0 top (schematic designator J2)
J2_x1 "5-1814832-1" TECO-5-1814832-1_V 2365,665 r0 top (schematic designator J2)
J3_x0 "5-1814832-1" TECO-5-1814832-1_V 2945,5100 r0 top (schematic designator J3)
J3_x1 "5-1814832-1" TECO-5-1814832-1_V 2945,2045 r0 top (schematic designator J3)
J4_x0 "5-1814832-1" TECO-5-1814832-1_V 1865,3720 r0 top (schematic designator J4)
J4_x1 "5-1814832-1" TECO-5-1814832-1_V 1865,665 r0 top (schematic designator J4)
J5_x0 "5-1814832-1" TECO-5-1814832-1_V 3445,5100 r0 top (schematic designator J5)
J5_x1 "5-1814832-1" TECO-5-1814832-1_V 3445,2045 r0 top (schematic designator J5)
J6_x0 "5-1814832-1" TECO-5-1814832-1_V 2190,5765 r0 top (schematic designator J6)
J6_x1 "5-1814832-1" TECO-5-1814832-1_V 2190,2710 r0 top (schematic designator J6)
J7_x0 "5-1814832-1" TECO-5-1814832-1_V 3445,4600 r0 top (schematic designator J7)
J7_x1 "5-1814832-1" TECO-5-1814832-1_V 3445,1545 r0 top (schematic designator J7)
J8_x0 "5-1814832-1" TECO-5-1814832-1_V 3450,4100 r0 top (schematic designator J8)
J8_x1 "5-1814832-1" TECO-5-1814832-1_V 3450,1045 r0 top (schematic designator J8)
P1 "Header 2" HDR1X2 4690,2565 r0 top
P2 "Header 2" HDR1X2 905,2635 r180 top
P3 "Header 2" HDR1X2 645,3820 r90 top
P4 "Header 2" HDR1X2 805,3055 r0 top
P5 "Header 2" HDR1X2 905,3175 r90 top
P6 "Header 1" Header1 4830,1685 r0 top
P7 "Header 1" Header1 4710,1685 r0 top
P8 "Header 1" Header1 4830,4660 r0 top
P9 "Header 1" Header1 4710,4660 r0 top
P10_x0 "Header 1" Header1 2465,5215 r90 top (schematic designator P10)
P10_x1 "Header 1" Header1 2465,2160 r90 top (schematic designator P10)
P11_x0 "Header 1" Header1 2585,5215 r90 top (schematic designator P11)
P11_x1 "Header 1" Header1 2585,2160 r90 top (schematic designator P11)
P12_x0 "Header 3X2" HDR2X3 1440,4895 r90 top (schematic designator P12)
P12_x1 "Header 3X2" HDR2X3 1440,1840 r90 top (schematic designator P12)
P13_x0 "Header 1" Header1 2930,3755 r90 top (schematic designator P13)
P13_x1 "Header 1" Header1 2930,700 r90 top (schematic designator P13)
P14_x0 "Header 1" Header1 3050,3755 r90 top (schematic designator P14)
P14_x1 "Header 1" Header1 3050,700 r90 top (schematic designator P14)
P15_x0 "Header 1" Header1 1760,5030 r90 top (schematic designator P15)
P15_x1 "Header 1" Header1 1760,1975 r90 top (schematic designator P15)
P16_x0 "Header 6" HDR1X6 4000,3410 r180 top (schematic designator P16)
P16_x1 "Header 6" HDR1X6 4000,355 r180 top (schematic designator P16)
P17_x0 "Header 1" Header1 2500,4155 r90 top (schematic designator P17)
P17_x1 "Header 1" Header1 2500,1100 r90 top (schematic designator P17)
P18_x0 "Header 1" Header1 2775,4295 r90 top (schematic designator P18)
P18_x1 "Header 1" Header1 2775,1240 r90 top (schematic designator P18)
P19_x0 "Header 2" HDR1X2 1340,4525 r0 top (schematic designator P19)
P19_x1 "Header 2" HDR1X2 1340,1470 r0 top (schematic designator P19)
P20_x0 "Header 2" HDR1X2 1440,4645 r180 top (schematic designator P20)
P20_x1 "Header 2" HDR1X2 1440,1590 r180 top (schematic designator P20)
P21_x0 "Header 2" HDR1X2 4245,4855 r180 top (schematic designator P21)
P21_x1 "Header 2" HDR1X2 4245,1800 r180 top (schematic designator P21)
P22_x0 "Header 2" HDR1X2 4145,4975 r0 top (schematic designator P22)
P22_x1 "Header 2" HDR1X2 4145,1920 r0 top (schematic designator P22)
P23_x0 "Header 2" HDR1X2 4245,4525 r180 top (schematic designator P23)
P23_x1 "Header 2" HDR1X2 4245,1470 r180 top (schematic designator P23)
P24_x0 "Header 2" HDR1X2 4145,4645 r0 top (schematic designator P24)
P24_x1 "Header 2" HDR1X2 4145,1590 r0 top (schematic designator P24)
R1 "<50Ohm" RESC1609X50X30NL8T20 4290,6800 r0 top
R2_x0 "(50Ohm)" RESC1609X50X30NL8T20 2120,5065 r180 top (schematic designator R2)
R2_x1 "(50Ohm)" RESC1609X50X30NL8T20 2120,2010 r180 top (schematic designator R2)
R3_x0 "(50Ohm)" RESC1609X50X30NL8T20 2365,4130 r180 top (schematic designator R3)
R3_x1 "(50Ohm)" RESC1609X50X30NL8T20 2365,1075 r180 top (schematic designator R3)
R4_x0 "(50Ohm)" RESC1609X50X30NL8T20 2779.2,4669.19 r90 top (schematic designator R4)
R4_x1 "(50Ohm)" RESC1609X50X30NL8T20 2779.2,1614.19 r90 top (schematic designator R4)
R5_x0 "(50Ohm)" RESC1609X50X30NL8T20 2260,4130 r180 top (schematic designator R5)
R5_x1 "(50Ohm)" RESC1609X50X30NL8T20 2260,1075 r180 top (schematic designator R5)
R6_x0 "<50Ohm" RESC1609X50X30NL8T20 2445,5555 r270 top (schematic designator R6)
R6_x1 "<50Ohm" RESC1609X50X30NL8T20 2445,2500 r270 top (schematic designator R6)
R7_x0 "(50Ohm)" RESC1609X50X30NL8T20 2779.2,4564.19 r90 top (schematic designator R7)
R7_x1 "(50Ohm)" RESC1609X50X30NL8T20 2779.2,1509.19 r90 top (schematic designator R7)
R8_x0 "(50Ohm)" RESC1609X50X30NL8T20 2465,5640 r180 top (schematic designator R8)
R8_x1 "(50Ohm)" RESC1609X50X30NL8T20 2465,2585 r180 top (schematic designator R8)
R9_x0 "<50Ohm" RESC1609X50X30NL8T20 2990,4095 r270 top (schematic designator R9)
R9_x1 "<50Ohm" RESC1609X50X30NL8T20 2990,1040 r270 top (schematic designator R9)
R10_x0 "(50Ohm)" RESC1609X50X30NL8T20 2779.2,4459.19 r90 top (schematic designator R10)
R10_x1 "(50Ohm)" RESC1609X50X30NL8T20 2779.2,1404.19 r90 top (schematic designator R10)
R11_x0 "(50Ohm)" RESC1609X50X30NL8T20 2970,4180 r0 top (schematic designator R11)
R11_x1 "(50Ohm)" RESC1609X50X30NL8T20 2970,1125 r0 top (schematic designator R11)
R12_x0 "Resistor L" RESL 2225,4790 r0 top (schematic designator R12)
R12_x1 "Resistor L" RESL 2225,1735 r0 top (schematic designator R12)
R13_x0 "Resistor L" RESL 2405,4450 r270 top (schematic designator R13)
R13_x1 "Resistor L" RESL 2405,1395 r270 top (schematic designator R13)
R14 "<50Ohm" RESC1609X50X30NL8T20 4940,6615 r90 top
R15 "<50Ohm" RESC1609X50X30NL8T20 4820,6615 r90 top
R16 "<50Ohm" RESC1609X50X30NL8T20 4880,6615 r90 top
R17 "<50Ohm" RESC1609X50X30NL8T20 4290,6725 r0 top
R18 "<50Ohm" RESC1609X50X30NL8T20 4760,6615 r90 top
U1 "TPS73218DBVT" DBV0005A_N 4930,2640 r180 top
U2 "TPS73218DBVT" DBV0005A_N 665,2560 r0 top
U3 "TPS73218DBVT" DBV0005A_N 4930,3470 r180 top
U4 "TPS73218DBVT" DBV0005A_N 4930,3055 r180 top
U5 "TPS73218DBVT" DBV0005A_N 665,3395 r0 top
U6 "TPS73218DBVT" DBV0005A_N 665,2980 r0 top
U7 "CDCLVC1106PWR" FP-PW0014A-MFG 4590,6775 r0 top
uP1 "Arduino Due" "Arduino Due" 330,6255 r0 top

## Footprints (in the part's own frame and the unit in brackets; to place one, negate y for a bottom-side part, rotate by r counter-clockwise, add the part's x,y. Pads: shape width x height; smd on the part's side, far side on the other; paste and mask are expansions set on the pad)
"Arduino Due" [mm]
  round 1.5 hole 0.9: 0/RX0(63.5,50.8) 1/TX0(60.96,50.8) 2(58.42,50.8) 3(55.88,50.8) 4(53.34,50.8) 5(50.8,50.8) 6(48.26,50.8) 7(45.72,50.8) 8(41.656,50.8) 9(39.116,50.8) 10(36.576,50.8) 11(34.036,50.8) 12(31.496,50.8) 13(28.956,50.8) 14/TX3(68.58,50.8) 15/RX3(71.12,50.8) 16/TX2(73.66,50.8) 17/RX2(76.2,50.8) 18/TX1(78.74,50.8) 19/RX1(81.28,50.8) 20/SDA(21.336,50.8) 20/SDA(83.82,50.8) 21/SCL(18.796,50.8) 21/SCL(86.36,50.8) 22(93.98,48.26) 23(96.52,48.26) 24(93.98,45.72) 25(96.52,45.72) 26(93.98,43.18) 27(96.52,43.18) 28(93.98,40.64) 29(96.52,40.64) 30(93.98,38.1) 31(96.52,38.1) 32(93.98,35.56) 33(96.52,35.56) 34(93.98,33.02) 35(96.52,33.02) 36(93.98,30.48) 37(96.52,30.48) 38(93.98,27.94) 39(96.52,27.94) 40(93.98,25.4) 41(96.52,25.4) 42(93.98,22.86) 43(96.52,22.86) 44(93.98,20.32) 45(96.52,20.32) 46(93.98,17.78) 47(96.52,17.78) 48(93.98,15.24) 49(96.52,15.24) 50(93.98,12.7) 51(96.52,12.7) 52(93.98,10.16) 53(96.52,10.16) 54/A0/ADC0(50.8,2.54) 55/A1/ADC1(53.34,2.54) 56/A2/ADC2(55.88,2.54) 57/A3/ADC3(58.42,2.54) 58/A4/ADC4(60.96,2.54) 59/A5/ADC5(63.5,2.54) 60/A6/ADC6(66.04,2.54) 61/A7/ADC7(68.58,2.54) 62/A8/ADC8(73.66,2.54) 63/A9/ADC9(76.2,2.54) 64/A10/ADC10(78.74,2.54) 65/A11/ADC11(81.28,2.54) 66/DAC0(83.82,2.54) 67/DAC1(86.36,2.54) 68/CANRX(88.9,2.54) 69/CANTX(91.44,2.54) +3.3V(35.56,2.54) +5V(38.1,2.54) +5V(93.98,50.8) +5V(96.52,50.8) AREF(23.876,50.8) GND(26.416,50.8) GND(40.64,2.54) GND(43.18,2.54) GND(93.98,7.62) GND(96.52,7.62) IOREF(30.48,2.54) NC(27.94,2.54) RESET(33.02,2.54) VIN(45.72,2.54)
  silkscreen extent 17.53,1.27 97.79,52.08
CAPC1608X90X35ML10T15 [mm] "Chip Capacitor, 2-Leads, Body 1.7x0.9mm, IPC Low Density"
  rect 0.95x1.05 smd: 1(-0.725,0) 2(0.725,0)
  body extent -0.85,-0.45 0.85,0.45, height 0.9
CornerMount#1 [mil] "Ideally grounded mounting hole for board corners. 150mil distance."
  round 200 hole 100: 1(0,0)
CornerMount#2 [mil] "Ideally grounded mounting hole for board corners. 150mil distance."
  round 200 hole 100: 1(1600,-2140)
CornerMount#3 [mil] "Ideally grounded mounting hole for board corners. 150mil distance."
  round 200 hole 100: 1(0,-2140)
DBV0005A_N [mm] "SOT23, 5-Leads, Body 3.05x1.75mm, Pitch 0.95mm, IPC Medium Density"
  rrect17% 1x0.6 smd: 1(-1.375,0.95) 2(-1.375,0) 3(-1.375,-0.95) 4(1.375,-0.95) 5(1.375,0.95)
  silkscreen extent -1.5,-1.55 0.5,1.92, body extent -1.42,-1.46 1.42,1.46, height 1.08
FP-PW0014A-MFG [mm]
  rect 1.6x0.35 smd paste-1000 mask+0: 1(-2.8,1.95) 2(-2.8,1.3) 3(-2.8,0.65) 4(-2.8,0) 5(-2.8,-0.65) 6(-2.8,-1.3) 7(-2.8,-1.95) 8(2.8,-1.95) 9(2.8,-1.3) 10(2.8,-0.65) 11(2.8,0) 12(2.8,0.65) 13(2.8,1.3) 14(2.8,1.95)
  silkscreen extent -4.32,-2.55 2.25,2.55, body extent -3.7,-2.8 3.7,2.8, height 0.25
HDR1X2 [mm] "Connector; Header; 2 Position"
  rect 1.5x1.5 hole 0.9: 1(0,0)
  round 1.5 hole 0.9: 2(2.54,0)
  silkscreen extent -1.27,-1.27 3.81,1.27
HDR1X6 [mm] "Connector; Header; 6 Position"
  rect 1.5x1.5 hole 0.9: 1(0,0)
  round 1.5 hole 0.9: 2(2.54,0) 3(5.08,0) 4(7.62,0) 5(10.16,0) 6(12.7,0)
  silkscreen extent -1.27,-1.27 13.97,1.27
HDR2X3 [mm] "Connector; Header; 3x2 Position"
  rect 1.5x1.5 hole 0.9: 1(0,0)
  round 1.5 hole 0.9: 2(0,2.54) 3(2.54,0) 4(2.54,2.54) 5(5.08,0) 6(5.08,2.54)
  silkscreen extent -1.27,-1.27 6.35,3.81
Header1 [mm] "Single header connection"
  round 1.5 hole 0.9 mask+0.056: 1(0,0)
  silkscreen extent -1.25,-1.25 1.25,1.25
QFN50P800X800X80_HS-57N_WIDEVIAS [mm] "QFN, 56-Leads, Body 8.00x8.00mm, Pitch 0.50mm, Thermal Pad 5.94x5.94mm, IPC Medium Density"
  oval 0.75x0.25 smd: 1(-3.95,3.25) 2(-3.95,2.75) 3(-3.95,2.25) 4(-3.95,1.75) 5(-3.95,1.25) 6(-3.95,0.75) 7(-3.95,0.25) 8(-3.95,-0.25) 9(-3.95,-0.75) 10(-3.95,-1.25) 11(-3.95,-1.75) 12(-3.95,-2.25) 13(-3.95,-2.75) 14(-3.95,-3.25) 29(3.95,-3.25) 30(3.95,-2.75) 31(3.95,-2.25) 32(3.95,-1.75) 33(3.95,-1.25) 34(3.95,-0.75) 35(3.95,-0.25) 36(3.95,0.25) 37(3.95,0.75) 38(3.95,1.25) 39(3.95,1.75) 40(3.95,2.25) 41(3.95,2.75) 42(3.95,3.25)
  oval 0.25x0.75 smd: 15(-3.25,-3.95) 16(-2.75,-3.95) 17(-2.25,-3.95) 18(-1.75,-3.95) 19(-1.25,-3.95) 20(-0.75,-3.95) 21(-0.25,-3.95) 22(0.25,-3.95) 23(0.75,-3.95) 24(1.25,-3.95) 25(1.75,-3.95) 26(2.25,-3.95) 27(2.75,-3.95) 28(3.25,-3.95) 43(3.25,3.95) 44(2.75,3.95) 45(2.25,3.95) 46(1.75,3.95) 47(1.25,3.95) 48(0.75,3.95) 49(0.25,3.95) 50(-0.25,3.95) 51(-0.75,3.95) 52(-1.25,3.95) 53(-1.75,3.95) 54(-2.25,3.95) 55(-2.75,3.95) 56(-3.25,3.95)
  rect 5.94x5.94 smd: 30(0,0)
  silkscreen extent -4.92,-4.15 4.15,4.15, body extent -4,-4 4,4, height 0.8
RESC1609X50X30NL8T20 [mm] "Chip Resistor, 2-Leads, Body 1.65x0.95mm, IPC Medium Density"
  rect 0.8x0.95 smd: 1(-0.65,0) 2(0.65,0)
  body extent -0.82,-0.48 0.82,0.48, height 0.5
RESL [mm] "Chip Resistor, 2-Leads, Body 1.70x0.90mm, IPC Medium Density"
  rect 0.9x0.9 smd: 1(0,0) 2(1.6,0) 3(0,1.6)
  body extent -0.45,-0.45 1.65,1.65, height 0.55
SOP50P310X90-8N [mm]
  rect 0.85x0.3 smd: 1(-1.575,0.75) 2(-1.575,0.25) 3(-1.575,-0.25) 4(-1.575,-0.75) 5(1.575,-0.75) 6(1.575,-0.25) 7(1.575,0.25) 8(1.575,0.75)
  silkscreen extent -2,-1 0.8,1.25, body extent -1.55,-1 1.55,1, height 0.9
SOP65P640X110-16N [mm]
  rect 1.475x0.45 smd: 1(-2.938,2.275) 2(-2.938,1.625) 3(-2.938,0.975) 4(-2.938,0.325) 5(-2.938,-0.325) 6(-2.938,-0.975) 7(-2.938,-1.625) 8(-2.938,-2.275) 9(2.938,-2.275) 10(2.938,-1.625) 11(2.938,-0.975) 12(2.938,-0.325) 13(2.938,0.325) 14(2.938,0.975) 15(2.938,1.625) 16(2.938,2.275)
  silkscreen extent -3.68,-2.5 1.85,2.85, body extent -3.2,-2.5 3.2,2.5, height 1.1
SOP65P640X120-14N [mm]
  rect 1.475x0.45 smd: 1(-2.938,1.95) 2(-2.938,1.3) 3(-2.938,0.65) 4(-2.938,0) 5(-2.938,-0.65) 6(-2.938,-1.3) 7(-2.938,-1.95) 8(2.938,-1.95) 9(2.938,-1.3) 10(2.938,-0.65) 11(2.938,0) 12(2.938,0.65) 13(2.938,1.3) 14(2.938,1.95)
  silkscreen extent -3.67,-2.5 1.85,2.53, body extent -3.2,-2.5 3.2,2.5, height 1.13
TECO-5-1814832-1_V [mm] "THD, 5-Leads, Body 6.4x6.4mm, Pitch 5.08mm"
  round 2 hole 1.5: 1(0,0)
  round 2.1 hole 1.6: 2(-2.54,2.54) 3(-2.54,-2.54) 4(2.54,-2.54) 5(2.54,2.54)
  silkscreen extent -3.2,-3.2 3.2,3.2, body extent -3.21,-3.21 3.19,3.19, height 9.5

## Part data
C1 C2 C3 C4 C5 C6 C7 C8 C9 C10 C11 C12 C13 C14 C15 C16 C17 C18 C38_x0 C38_x1 C39_x0 C39_x1 C42_x0 C42_x1 C43_x0 C43_x1 C44_x0 C44_x1 C45_x0 C45_x1 C46_x0 C46_x1 C47_x0 C47_x1 C48_x0 C48_x1 C49_x0 C49_x1 C50_x0 C50_x1 C51_x0 C51_x1 C52_x0 C52_x1 C53_x0 C53_x1 C54_x0 C54_x1 C55_x0 C55_x1 C56_x0 C56_x1 C57_x0 C57_x1 C58_x0 C58_x1 C59_x0 C59_x1 C60_x0 C60_x1 C61_x0 C61_x1: library part CMP-2000-04945-1, "0603,10nF", Capacitance=22pF, Case Size/Dimension=0603, Dielectric=C0G, Manufacturer=Murata, Package Description="2-Pin Surface Mount Device, Body 1.6 x 0.8 mm", Package Reference=603, Rated Voltage=50V, Tolerance (%)=±5%, Datasheet URL=https://datasheet.ciiva.com/11786/0900766b807a1cab-11786398.pdf, Datasheet Version=Jul-06, Manufacturer URL=http://www.murata.com/
C19 C21 C22 C24 C25 C28 C33_x0 C33_x1 C34_x0 C34_x1 C36_x0 C36_x1 C37_x0 C37_x1 C63: library part CMP-2000-04945-1, "0603,1uF", Capacitance=22pF, Case Size/Dimension=0603, Dielectric=C0G, Manufacturer=Murata, Package Description="2-Pin Surface Mount Device, Body 1.6 x 0.8 mm", Package Reference=603, Rated Voltage=50V, Tolerance (%)=±5%, Datasheet URL=https://datasheet.ciiva.com/11786/0900766b807a1cab-11786398.pdf, Datasheet Version=Jul-06, Manufacturer URL=http://www.murata.com/
C20 C23 C26 C27 C29 C30 C32_x0 C32_x1 C35_x0 C35_x1 C40_x0 C40_x1 C41_x0 C41_x1 C62: library part CMP-2000-04945-1, "0603,100nF", Capacitance=22pF, Case Size/Dimension=0603, Dielectric=C0G, Manufacturer=Murata, Package Description="2-Pin Surface Mount Device, Body 1.6 x 0.8 mm", Package Reference=603, Rated Voltage=50V, Tolerance (%)=±5%, Datasheet URL=https://datasheet.ciiva.com/11786/0900766b807a1cab-11786398.pdf, Datasheet Version=Jul-06, Manufacturer URL=http://www.murata.com/
C31_x0 C31_x1: library part CMP-2000-04945-1, "0603,2-3pF", Capacitance=22pF, Case Size/Dimension=0603, Dielectric=C0G, Manufacturer=Murata, Package Description="2-Pin Surface Mount Device, Body 1.6 x 0.8 mm", Package Reference=603, Rated Voltage=50V, Tolerance (%)=±5%, Datasheet URL=https://datasheet.ciiva.com/11786/0900766b807a1cab-11786398.pdf, Datasheet Version=Jul-06, Manufacturer URL=http://www.murata.com/
C64: library part CMP-2000-04945-1, "0603,10uF", Capacitance=22pF, Case Size/Dimension=0603, Dielectric=C0G, Manufacturer=Murata, Package Description="2-Pin Surface Mount Device, Body 1.6 x 0.8 mm", Package Reference=603, Rated Voltage=50V, Tolerance (%)=±5%, Datasheet URL=https://datasheet.ciiva.com/11786/0900766b807a1cab-11786398.pdf, Datasheet Version=Jul-06, Manufacturer URL=http://www.murata.com/
IC1 IC2 IC5_x0 IC5_x1 IC6_x0 IC6_x1: "Integrated Circuit", Manufacturer_Name="Texas Instruments", Datasheet Link=http://www.ti.com/lit/gpn/tdc7200, Height=1.2mm, Manufacturer_Part_Number=TDC7200PWR
IC3 IC4 IC8_x0 IC8_x1: "Integrated Circuit", Manufacturer_Name="Maxim Integrated", Datasheet Link=https://pdfserv.maximintegrated.com/en/ds/MAX13000E-MAX13005E.pdf, Height=1.1mm, Manufacturer_Part_Number=MAX13003EEUE+
IC7_x0 IC7_x1 IC9_x0 IC9_x1 IC10_x0 IC10_x1 IC11_x0 IC11_x1 IC12_x0 IC12_x1 IC13_x0 IC13_x1: "Flip Flops 1.65-5.5V CMOS Single D-Type", Manufacturer_Name="ON Semiconductor", Datasheet Link=http://www.onsemi.com/pub/Collateral/NL17SZ74-D.PDF, Height=0.9mm, Manufacturer_Part_Number=NL17SZ74USG
J1_x0 J1_x1 J2_x0 J2_x1 J3_x0 J3_x1 J4_x0 J4_x1 J5_x0 J5_x1 J6_x0 J6_x1 J7_x0 J7_x1 J8_x0 J8_x1: library part CMP-2000-05415-1, "SMA Connector, Pitch 5.08 mm, 1 Position, Height 9.5 mm, Tail Length 4 mm, -65 to 165 degC, RoHS, Bulk", Frequency Max=3GHz, Manufacturer="TE Connectivity", Package Description="SMA Connector, Pitch 5.08 mm, 1 Position, Height 9.5 mm, Tail Length 4 mm", Coaxial Cable Types=-, Coaxial Termination=Solder, Connector Body Style=StraightJack, Connector Mounting=PCBMount, Connector Type=SMACoaxial, Contact Material=BerylliumCopper, Contact Plating=GoldPlatedContacts, Datasheet URL=http://www.onlinecomponents.com/productFiles/mf-AMP/eng_cd_1814832_a.pdf, Datasheet Version="Rev. B1, 03/2011", Impedance=50ohm, Manufacturer URL=http://www.te.com/, Package Reference=5-1814832-1, Product Range=ZDCSeries, SVHC=NoSVHC(15-Jun-2015)
P1 P2 P3 P4 P5 P19_x0 P19_x1 P20_x0 P20_x1 P21_x0 P21_x1 P22_x0 P22_x1 P23_x0 P23_x1 P24_x0 P24_x1: "Header, 2-Pin", LatestRevisionDate=17-Jul-2002, LatestRevisionNote="Re-released for DXP Platform.", Publisher="Altium Limited"
P12_x0 P12_x1: "Header, 3-Pin, Dual row", LatestRevisionDate=17-Jul-2002, LatestRevisionNote="Re-released for DXP Platform.", Publisher="Altium Limited"
P16_x0 P16_x1: "Header, 6-Pin", LatestRevisionDate=17-Jul-2002, LatestRevisionNote="Re-released for DXP Platform.", Publisher="Altium Limited"
R1 R6_x0 R6_x1 R9_x0 R9_x1 R14 R15 R16 R17 R18: library part CMP-2000-03816-5, "0603,<50Ohm", Manufacturer="Vishay Semiconductor", Max Operating Temperature="155 degC", Min Operating Temperature="-55 degC", Package Quantity=5000, Voltage Rating="75 V", ComponentLink1Description="Manufacturer URL", ComponentLink1URL=http://www.vishay.com/, ComponentLink2Description=Datasheet, ComponentLink2URL=http://www.vishay.com/docs/20035/dcrcwe3.pdf, DatasheetVersion=06/2012, Height="0.45 mm", Length="1.55 mm", Mount="Surface Mount", Mounting Technology="Surface Mount", PackageDescription="2-Pin Surface Mount Device, Body 1.575 x 0.85 mm", PackageReference=0603, Packaging="Tape and Reel", Pins=2, REACH SVHC=Unknown, RoHSCompliant=true
R2_x0 R2_x1 R3_x0 R3_x1 R4_x0 R4_x1 R5_x0 R5_x1 R7_x0 R7_x1 R8_x0 R8_x1 R10_x0 R10_x1 R11_x0 R11_x1: library part CMP-2000-03816-5, "0603,(50Ohm),Do Not Populate", Manufacturer="Vishay Semiconductor", Max Operating Temperature="155 degC", Min Operating Temperature="-55 degC", Package Quantity=5000, Voltage Rating="75 V", ComponentLink1Description="Manufacturer URL", ComponentLink1URL=http://www.vishay.com/, ComponentLink2Description=Datasheet, ComponentLink2URL=http://www.vishay.com/docs/20035/dcrcwe3.pdf, DatasheetVersion=06/2012, Height="0.45 mm", Length="1.55 mm", Mount="Surface Mount", Mounting Technology="Surface Mount", PackageDescription="2-Pin Surface Mount Device, Body 1.575 x 0.85 mm", PackageReference=0603, Packaging="Tape and Reel", Pins=2, REACH SVHC=Unknown, RoHSCompliant=true
R12_x0 R12_x1 R13_x0 R13_x1: "Pick one 0603,0Ohm"
U1 U2 U3 U4 U5 U6: library part CMP-0394-00378-2, "Single Output Fast Transient Response LDO, 200 mA, Fixed 1.8 V Output, 1.7 to 5.5 V Input, with Reverse Current Protection, 5-pin SOT-23 (DBV), -40 to 85 degC, Green (RoHS & no Sb/Br)", Manufacturer="Texas Instruments", Accuracy(%)=1, Code_JEDEC=MO-178, ComponentLink1Description="Manufacturer URL", ComponentLink1URL=http://www.ti.com/, ComponentLink2Description=Datasheet, ComponentLink2URL=http://www.ti.com/general/docs/lit/getliterature.tsp?genericPartNumber=TPS73218&fileType=pdf, ComponentLink3Description="Package Specification", ComponentLink3URL=http://www.ti.com/litv/pdf/mpds018i, DatasheetVersion=SBVS037O, Eco-Plan="Green (RoHS & no Sb/Br)", Fixed Output Options(V)=1.8, Iout(Max)(A)=0.25, Iq(Typ)(mA)=0.4, Mounting Technology="Surface Mount", PackageDescription="5-Pin Plastic Small Outline, Body 1.60 Ãƒâ€” 2.90 mm, Pitch 0.95 mm", PackageReference=DBV0005A, PackageVersion=4073253-4/K, PartNumber=TPS73218DBVT, SubFamily="Single Channel LDO", Vdo(Typ)(mV)=40, Vin(Max)(V)=5.5, Vin(Min)(V)=1.7, Vout Adj(Max)(V)=1.8, Vout Adj(Min)(V)=1.8
U7: library part CMP-04855-000003-1, "IC CLK BUFFER 1:6 250MHZ 14TSSOP", Ambient Temperature Range High=+85°C, Ambient Temperature Range Low=-40°C, Manufacturer="Texas Instruments", Max Junction Temp=+125°C, Max Supply Voltage=3.6V, Min Supply Voltage=2.3V, Nominal Supply Current=3-6mA, Package=PW0014A, Temperature="-40°C to +85°C", Automotive=No, Category=IC, ComponentLink2Description=Datasheet, ComponentLink2URL=http://www.ti.com/lit/ds/symlink/cdclvc1106.pdf, Device Class L1="Integrated Circuits (ICs)", Device Class L2="Clock and Timing", Device Class L3="Clock Buffers", Digikey Description="IC CLK BUFFER 1:6 250MHZ 14TSSOP", Height=1.2mm, Ipc Land Pattern Name=SOP65P640X120-14, Lead Free=Yes, Manufacturer Part Number=CDCLVC1106PWR, Mouser Description="Clock Buffer Lo Jitter 1:6 LVCMOS Fan-out Clock Bfr", Number Of Elements=1, Number Of Inputs=1, Number Of Outputs=6, Octopart=https://octopart.com/cdclvc1106pwr-texas+instruments-18629865, Propagation Delay=2-2.6ns, RoHS=TRUE, Standoff Height=0.05mm, Temperature Range High=+85°C, Temperature Range Low=-40°C
uP1: "Header, 10-pin, 8-pin (4x), 18-pin dual row"

## Free pads (board coordinates)
  round 200 hole 100: 2(150,650) 2(150,8100) 2(650,150) 2(650,8600) 2(4910,150) 2(4910,8600) 2(5410,650) 2(5410,8100)

## Via types
v1: diameter 25, hole 15, Top Layer to Bottom Layer, 290 vias
v2: diameter 50, hole 28, Top Layer to Bottom Layer, 105 vias
v3: diameter 59.06, hole 35.43, Top Layer to Bottom Layer, 2 vias

## Nets (pads, with @x,y where several pads share a name; then routed paths per layer and width w, separated by ;. In a path a pad name is that pad's centre, name@x,y a point inside that pad or via, vN(x,y) a via of type N, cw(c..) or ccw(c..) an arc to the next point about the centre after c; other vN are vias at no path point)
+1.8VD: C2.1 C38_x0.2 C38_x1.2 C39_x0.2 C39_x1.2 C40_x0.2 C40_x1.2 C43_x0.2 C43_x1.2 C44_x0.2 C44_x1.2 C45_x0.2 C45_x1.2 C51_x0.2 C51_x1.2 IC7_x0.2 IC7_x0.7 IC7_x0.8 IC7_x1.2 IC7_x1.7 IC7_x1.8 IC8_x0.4 IC8_x0.5 IC8_x1.4 IC8_x1.5 IC9_x0.2 IC9_x0.7 IC9_x0.8 IC9_x1.2 IC9_x1.7 IC9_x1.8 IC10_x0.2 IC10_x0.7 IC10_x0.8 IC10_x1.2 IC10_x1.7 IC10_x1.8 IC11_x0.2 IC11_x0.7 IC11_x0.8 IC11_x1.2 IC11_x1.7 IC11_x1.8 IC12_x0.2 IC12_x0.7 IC12_x0.8 IC12_x1.2 IC12_x1.7 IC12_x1.8 IC13_x0.2 IC13_x0.7 IC13_x0.8 IC13_x1.2 IC13_x1.7 IC13_x1.8 P1.2 U1.5 | length 8448.1
  Top Layer w20: v1(2590,295) 2590.96,295.96 2590.96,310.96 2645,365 2695,365 ; v1(2590,3350) 2590.96,3350.96 2590.96,3360.96 2650,3420 2710,3420
  Top Layer w30: v1(2590,295) 2590,216.46 C44_x1.2@2591.46,215 ; v1(2590,3350) 2590,3271.46 C44_x0.2@2591.46,3270 ; v1(2780,445) 2780,366.46 C43_x1.2@2781.46,365 ; v1(2780,3500) 2780,3421.46 C43_x0.2@2781.46,3420 ; 3715,840 v2(3715,890) ; v2(3725,5135) 3725,4470.41 v2@3735,4460.41 ; v2(3735,2120) v2(3735,1400) 3738.23,1403.23 3886.77,1403.23 C51_x1.2@3890,1406.46 C51_x1.2@3888.03,1406.46 ; v2(3735,4455) 3738.23,4458.23 3886.77,4458.23 C51_x0.2@3890,4461.46 C51_x0.2@3888.03,4461.46 ; 3865,895 3865,1055 v2(3970,1160) ; 3865,3950 3865,4110 v2(3975,4220)
  Bottom Layer w30: v1(2780,445) 2922.67,445 2948.18,470.51 3090.85,470.51 3116.36,445 3303.49,445 3711.17,852.68 3711.17,886.17 v2(3715,890) ; v1(2780,3500) 2907.03,3500 2950.22,3543.19 3077.25,3543.19 3389.07,3855 3570,3855 v2(3715,4000) ; v1(3260,2925) v1(3260,2685) v1(3260,2445) 3260,2385.5 3410.84,2234.66 3620.34,2234.66 v2(3735,2120) ; v1(3260,5980) v1(3260,5740) v1(3260,5500) 3260,5440.5 3410.84,5289.66 3570.34,5289.66 v2(3725,5135) ; v2(3735,1400) 3735,1397.5 3970,1162.5 v2(3970,1160) ; v2(3735,4455) 3737.5,4455 3972.5,4220 v2(3975,4220) 3975,4080 4020,4035
+1.8VD_SHIFT: C4.1 C27.1 C30.1 IC3.4 IC3.5 IC4.4 IC4.5 P2.2 U2.5 | length 3235.9
  Top Layer w30: C27.1@910,4478.54 911.97,4478.54 930.35,4460.16 938.95,4460.16 950.67,4448.44 950.67,3504.71 820.47,3374.51 820.47,3172.19 886.31,3106.35 923.69,3106.35 954.53,3075.52 954.53,2933.95 805,2784.42 P2.2@805,2635 980,2460 980,1770.08 891.63,1681.71 891.63,1596.24 903.35,1584.53 IC4.5@915,1584.53
+1.8VDDAON: C14.1 P19_x0.1 P19_x1.1 U5.5 | length 3791.6
  Top Layer w30: 705,3445.04 C14.1@705,3506.46 ; U5.5@719.13,3432.4 722.32,3435.59 735.59,3435.59 v3(790,3490) ; v3(1045,2505) 1045,1765 P19_x1.1@1340,1470
  Bottom Layer w30: v3(1045,2505) 1045,3122.34 941.87,3225.47 884.49,3225.47 790,3319.96 790,3808.53 785,3813.53 785,4118.64 1191.36,4525 P19_x0.1@1340,4525
+1.8VDDMAIN: C8.1 P21_x0.1 P21_x1.1 U3.5 | length 3773.6
  Top Layer w30: v2(4170,2195) 4170,2032.29 4194.53,2007.77 4194.53,1850.47 P21_x1.1@4245,1800 ; v2(4655,4465) v2(4655,3425) 4660.41,3425 4666.71,3431.3 4874.57,3431.3 U3.5@4875.87,3432.6 4875.87,3370.71 4888.03,3358.54 C8.1@4890,3358.54
  Bottom Layer w30: v2(4170,2195) 4655,2680 v2(4655,3425) ; P21_x0.1@4245,4855 4631.17,4468.83 4651.17,4468.83 v2(4655,4465)
+1.8VDDSMALL: C10.1 P23_x0.1 P23_x1.1 U4.5 | length 3691.1
  Top Layer w30: P23_x1.1@4245,1470 4522.65,1747.65 4522.65,2148.15 4739.53,2365.03 4739.53,2924.53 v2(4790,2975) 4795.41,2975 4836.12,3015.71 4873.98,3015.71 U4.5@4875.87,3017.6 4875.87,2955.71 4888.03,2943.54 C10.1@4890,2943.54
  Bottom Layer w30: P23_x0.1@4245,4525 4745,4025 4745,3025.41 4790,2980.41 v2(4790,2975)
+1.8VDDTEST: C16.1 P4.1 U6.5
+1.8VPSU: P1.1 P2.1 P5.2 P20_x0.2 P20_x1.2 P22_x0.2 P22_x1.2 P24_x0.2 P24_x1.2 | length 4332.9
  Top Layer w30: P2.1@905,2635 989.53,2719.53 989.53,3190.47 P5.2@905,3275 ; P22_x1.2@4245,1920 4690,2365 P1.1@4690,2565
  Bottom Layer w30: P2.1@905,2635 905,2545 1210,2240 1300,2240 ; P5.2@905,3275 905,3688.99 1300,4083.99 1300,4120 ; 1360.52,2089.53 1390.47,2059.57 1390.47,2041.63 ; P1.1@4690,2565 4690,2665.5 4700,2675.5 4700,3660 4690,3670